# Altium PCB ESC ITERATION 2.PcbDoc (part 1 of 2)
Units mm, origin at the board's own origin, x right, y up, seen from the top; angles counter-clockwise.
Board outline 46 x 52 mm, 4 copper layers (Top Layer, Layer 1, Layer 2, Bottom Layer), stack 0.603 mm thick; 168 components, 143 nets, 732 pads, 629 vias.
Unrouted connection lines stored in the file: 310.
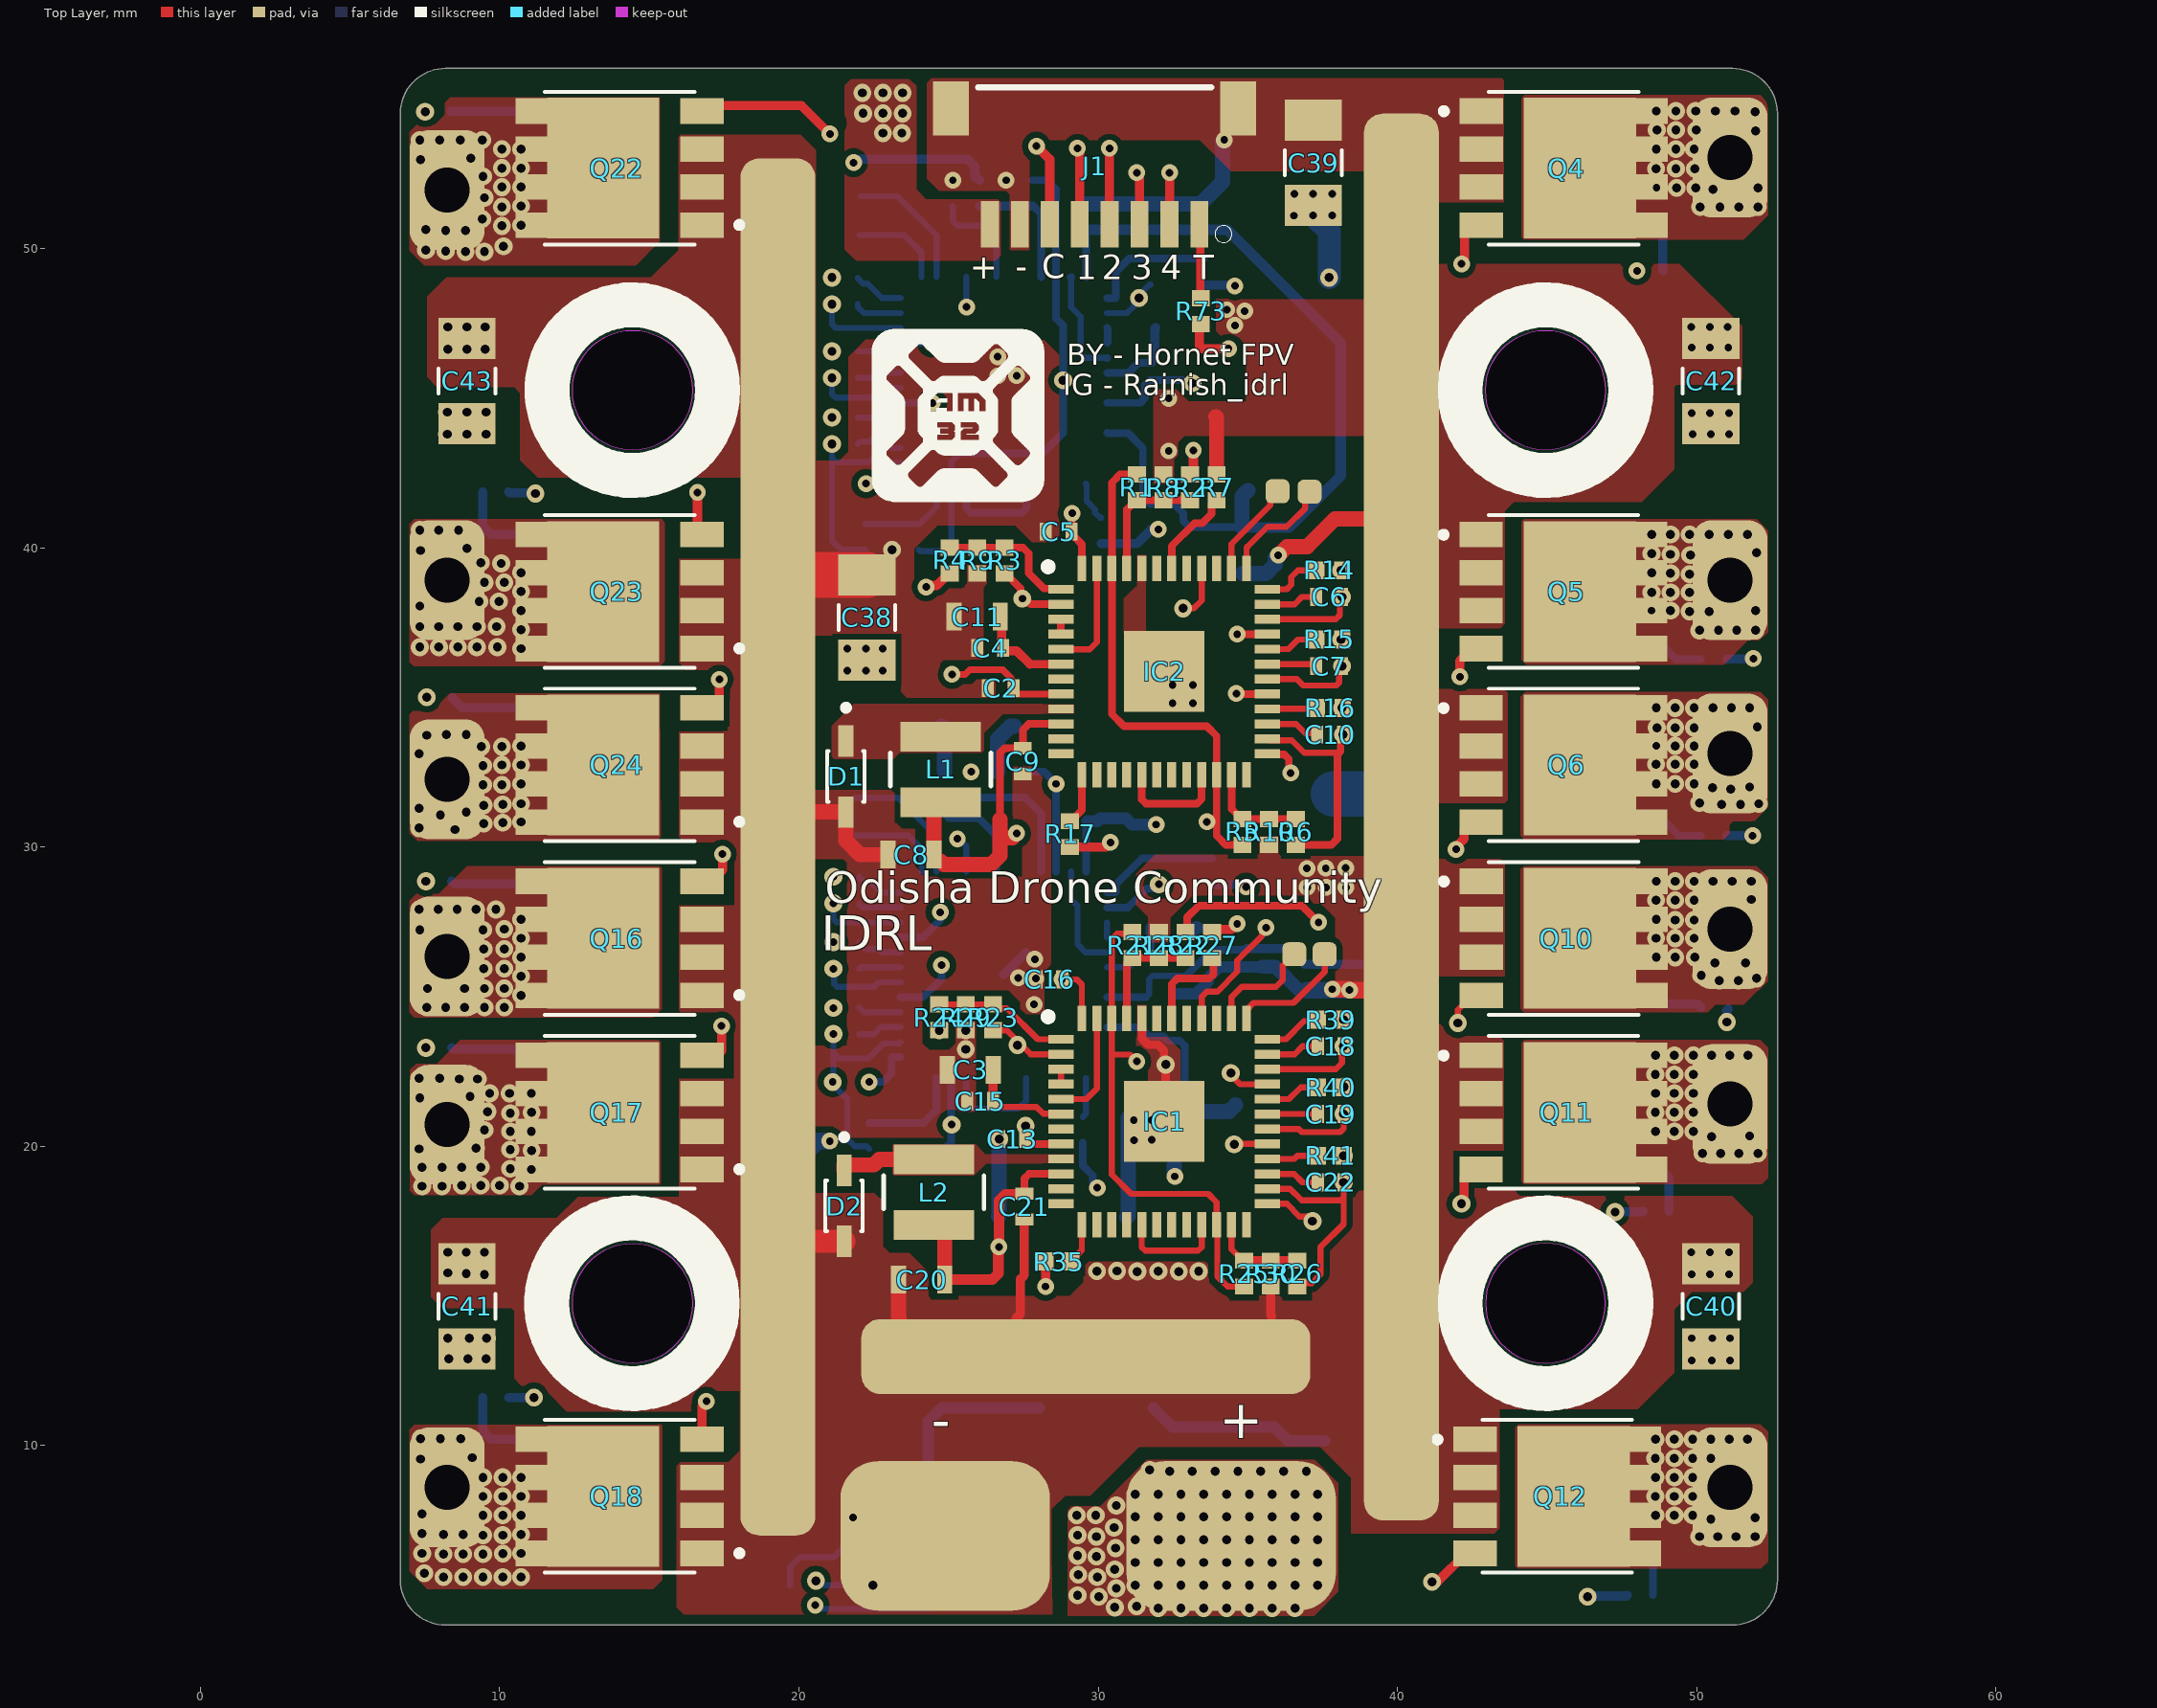
[diagram p0: Top Layer view]
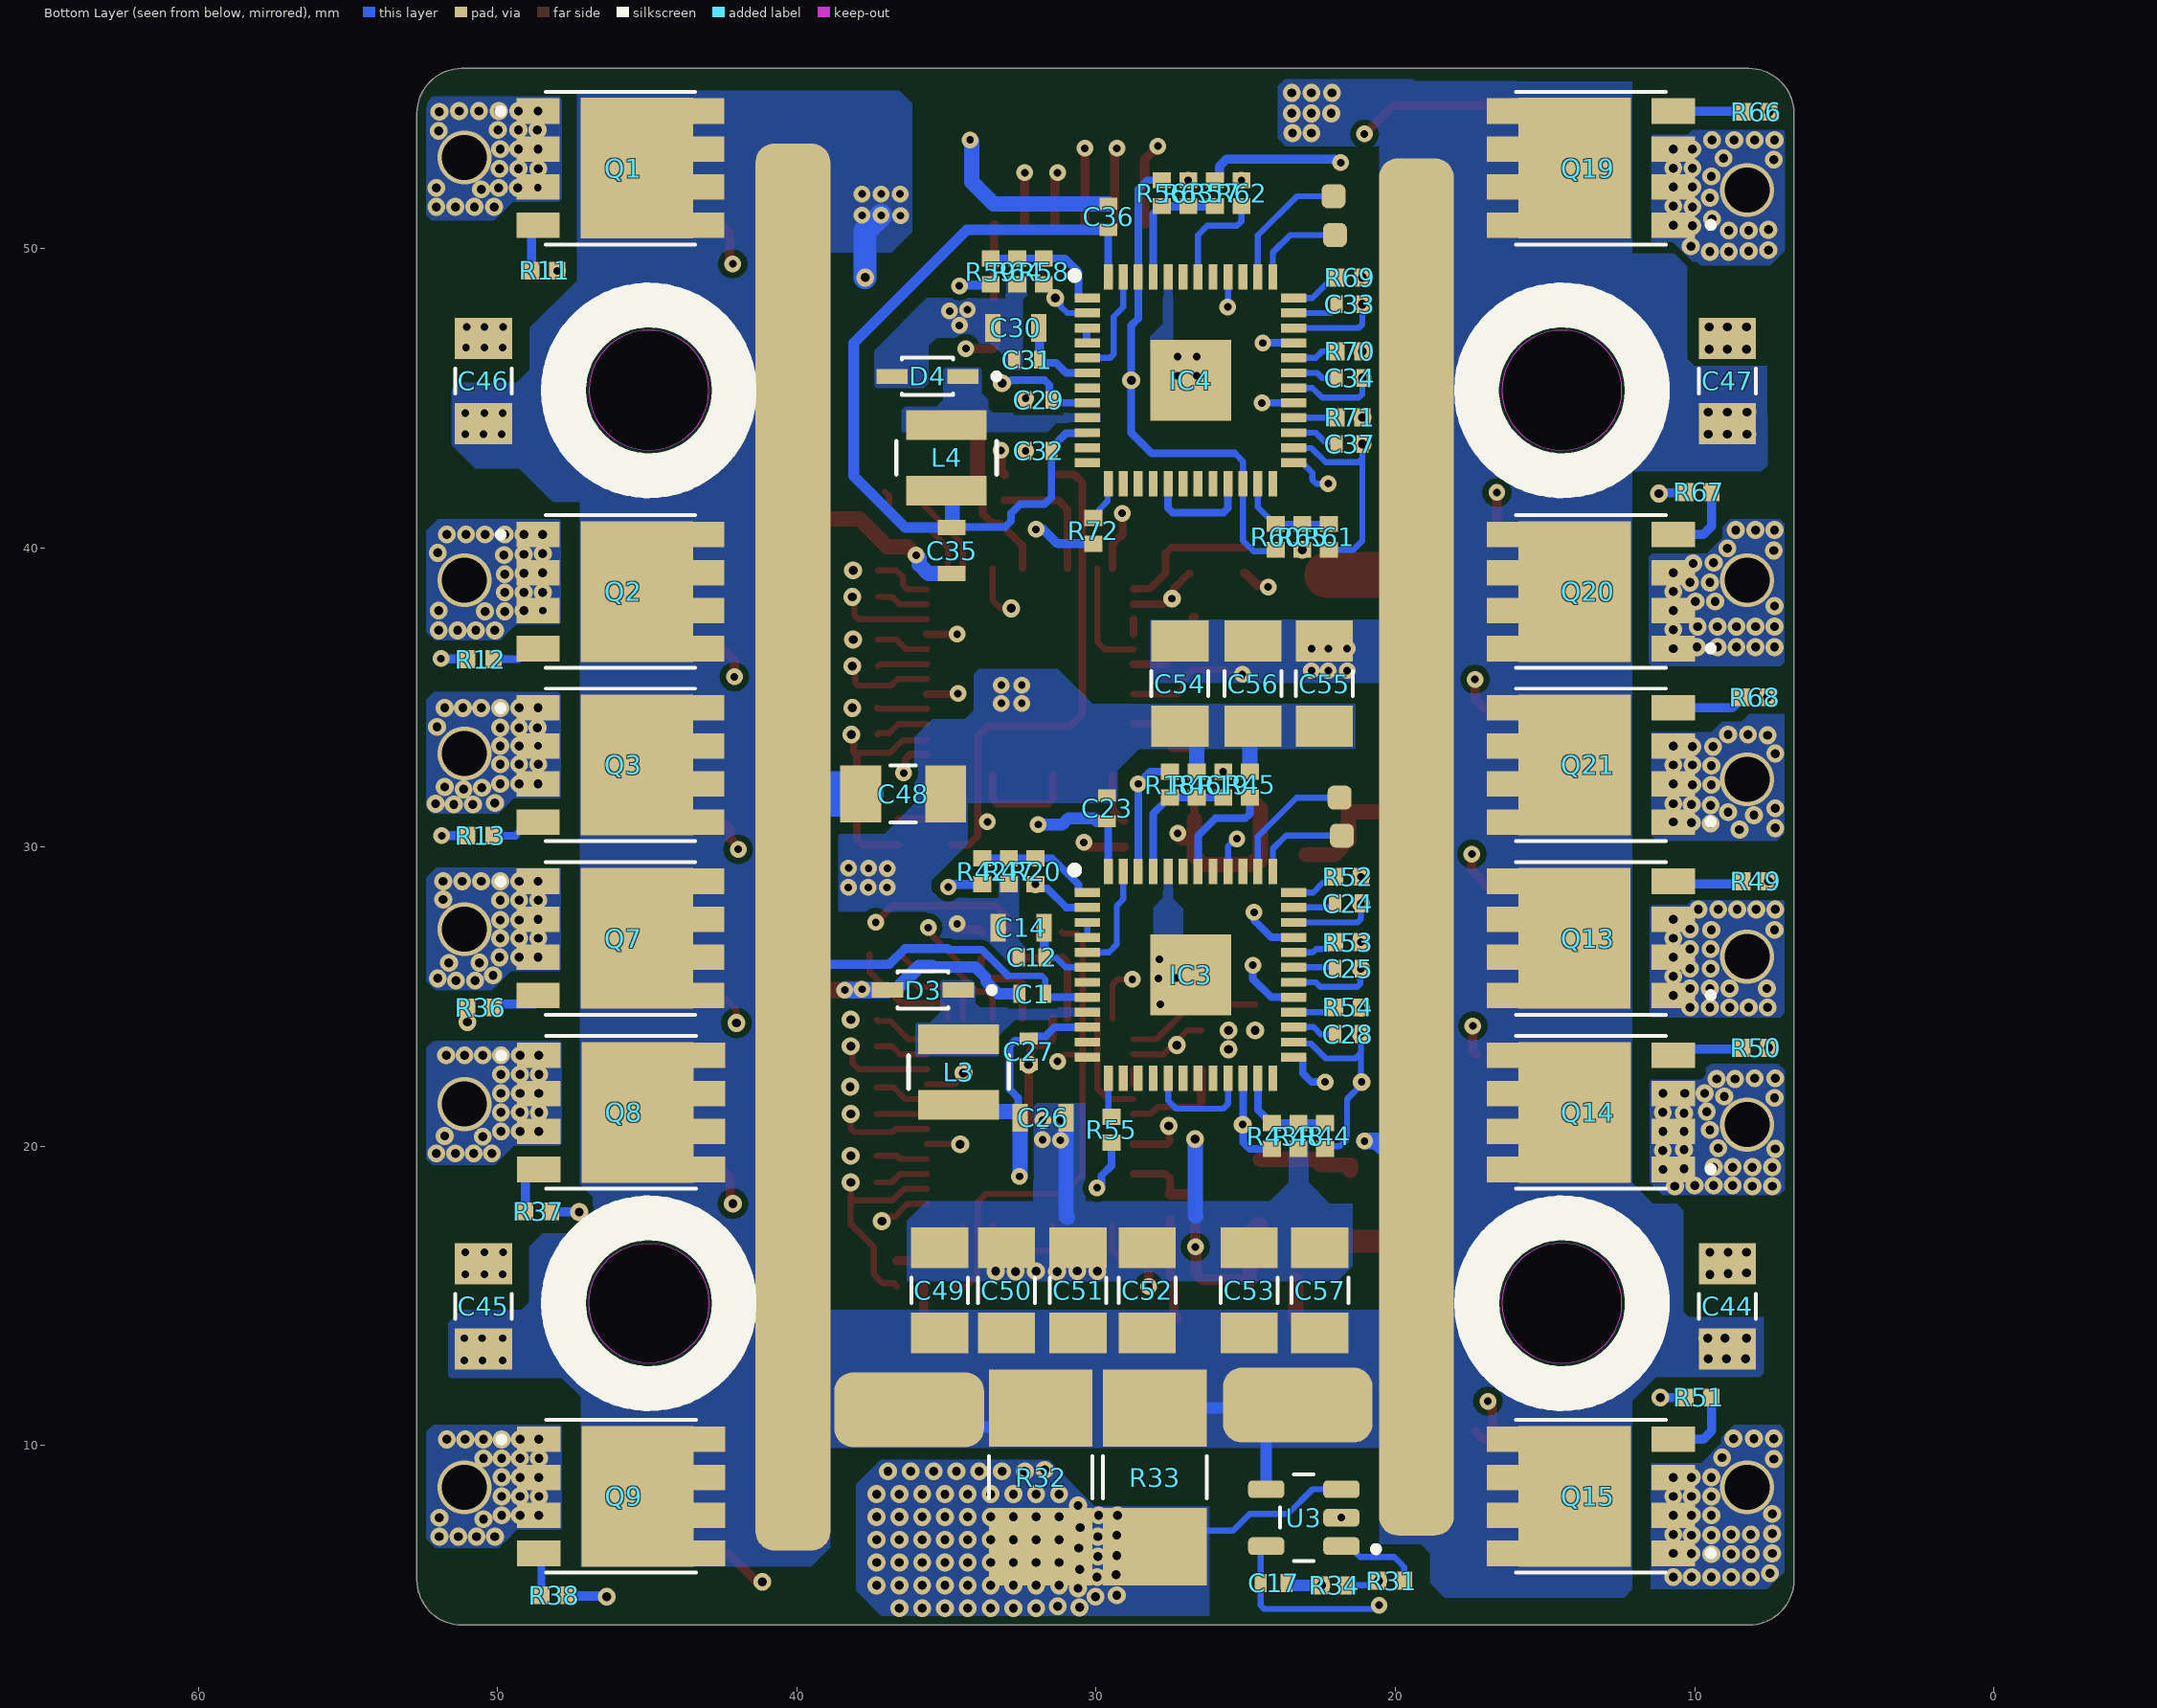
[diagram p1: Bottom Layer view, seen from below]
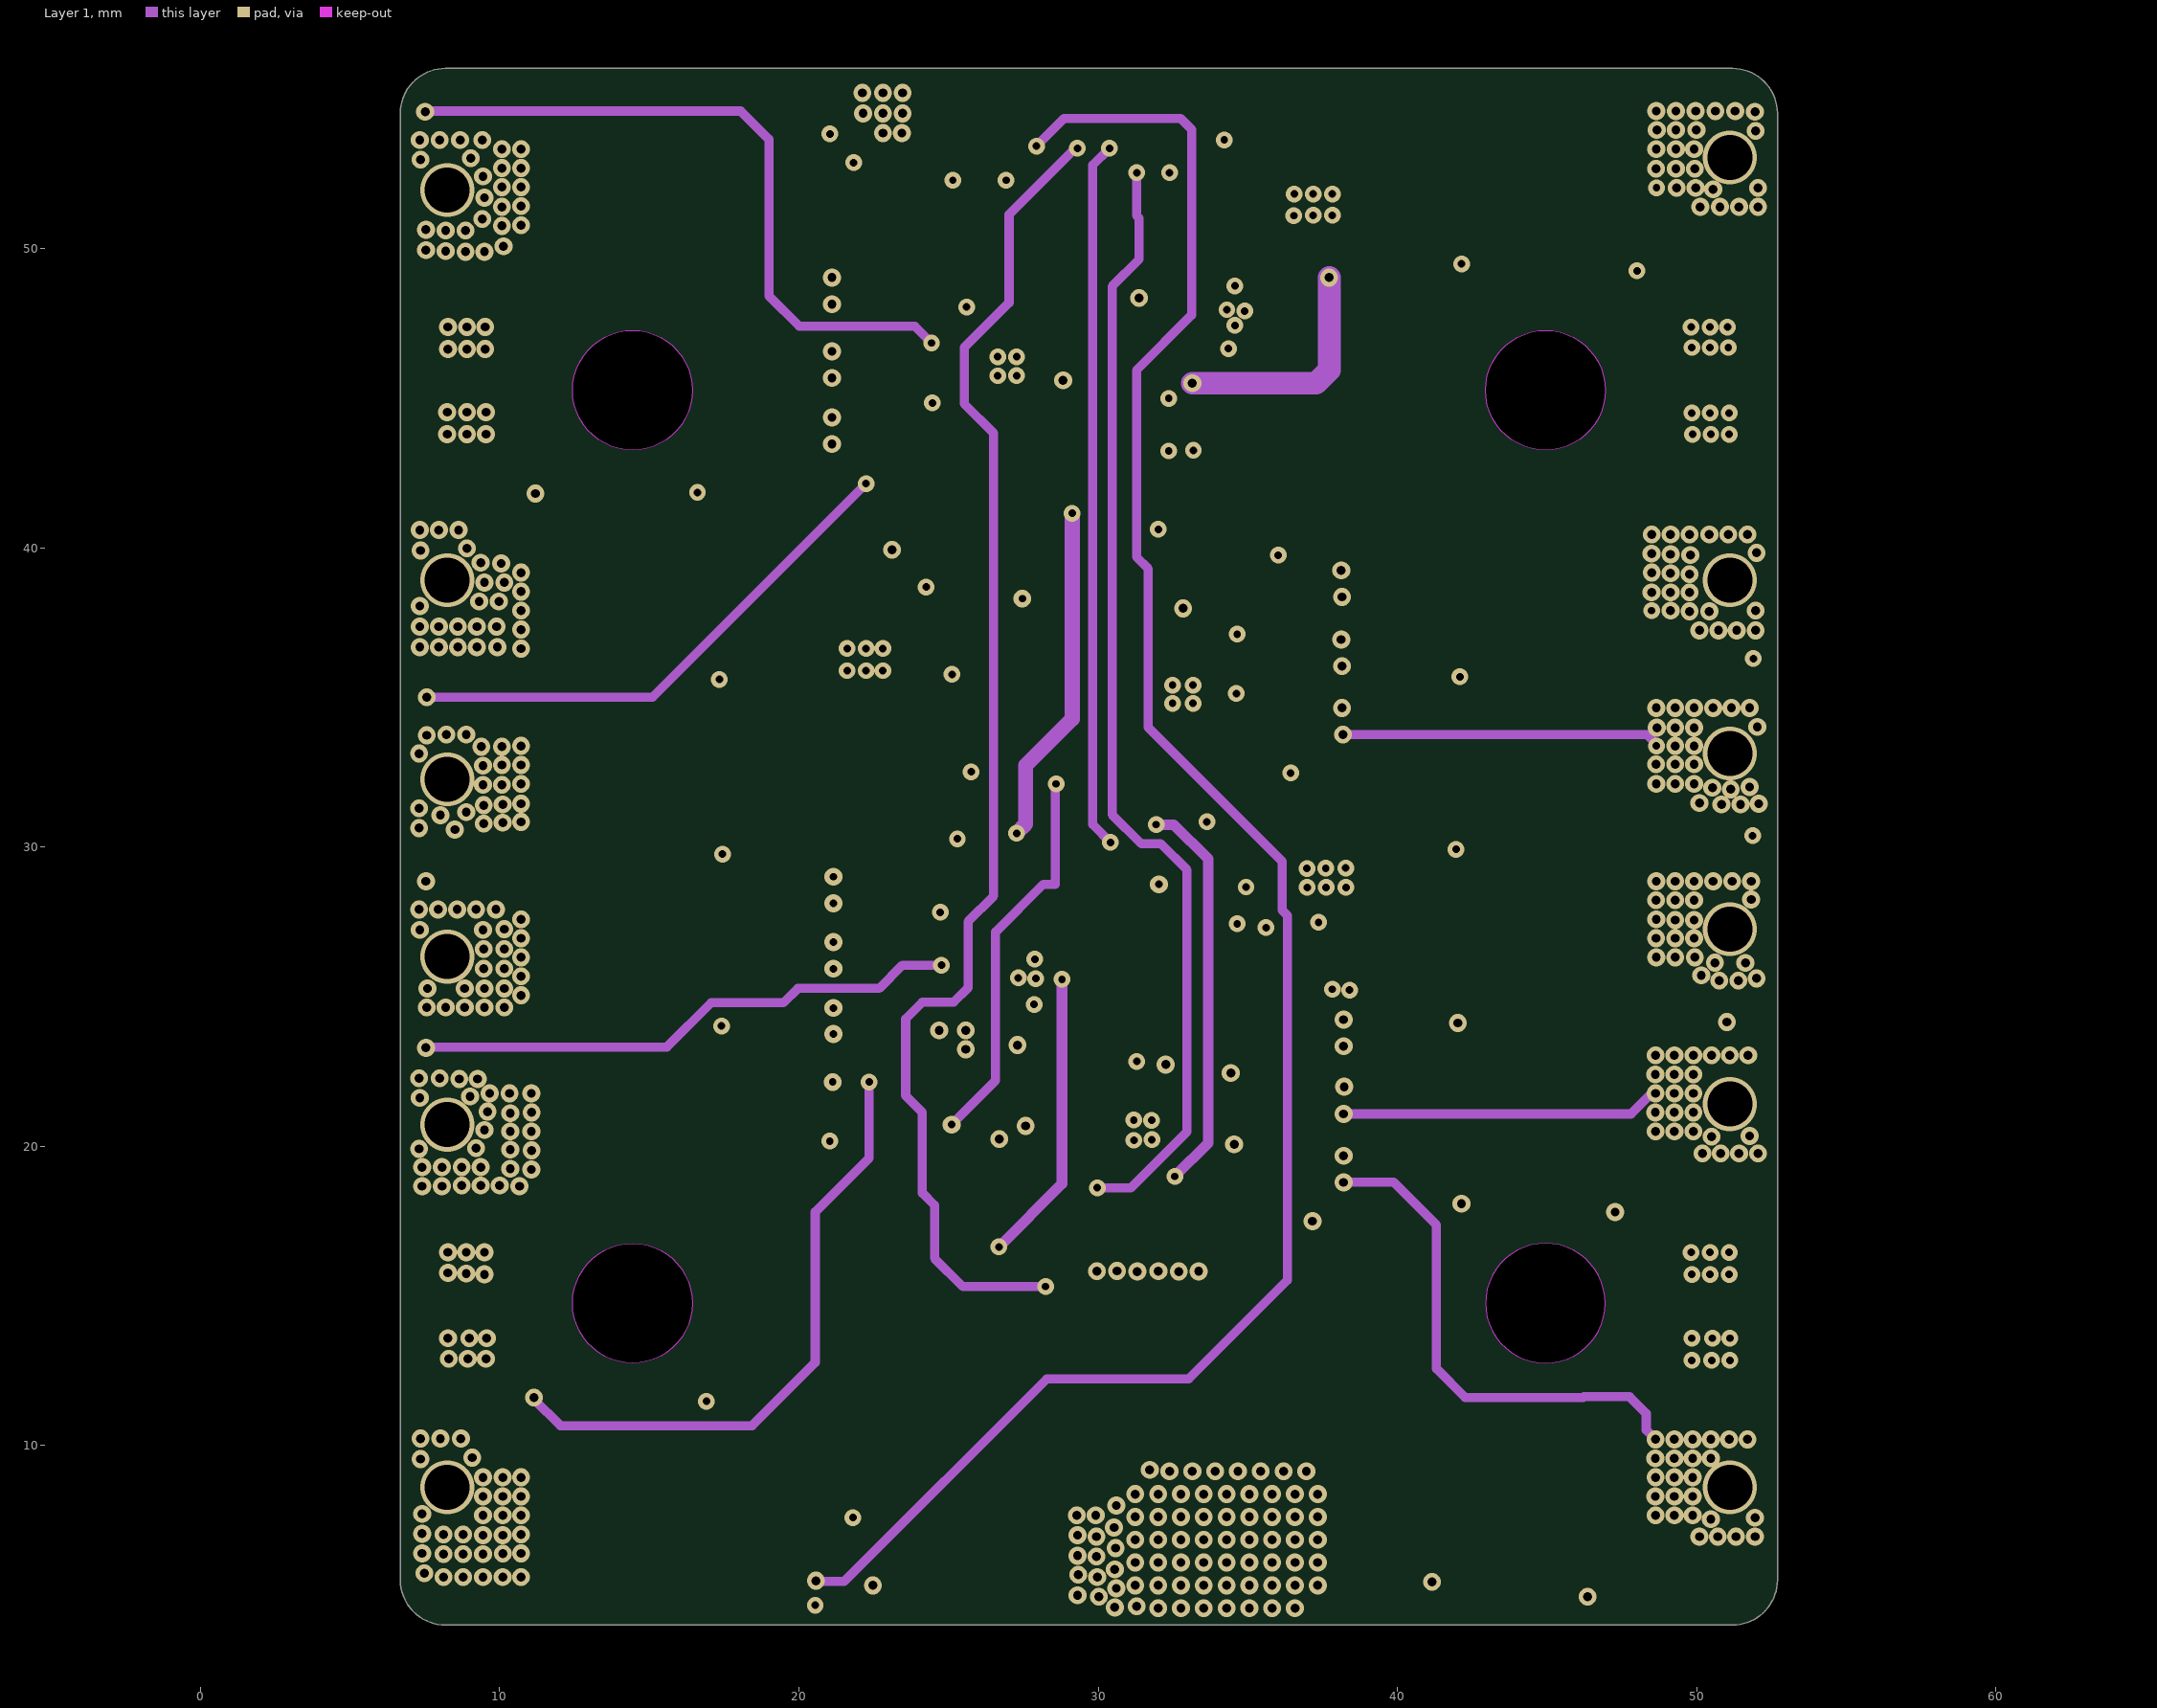
[diagram p2: Layer 1]
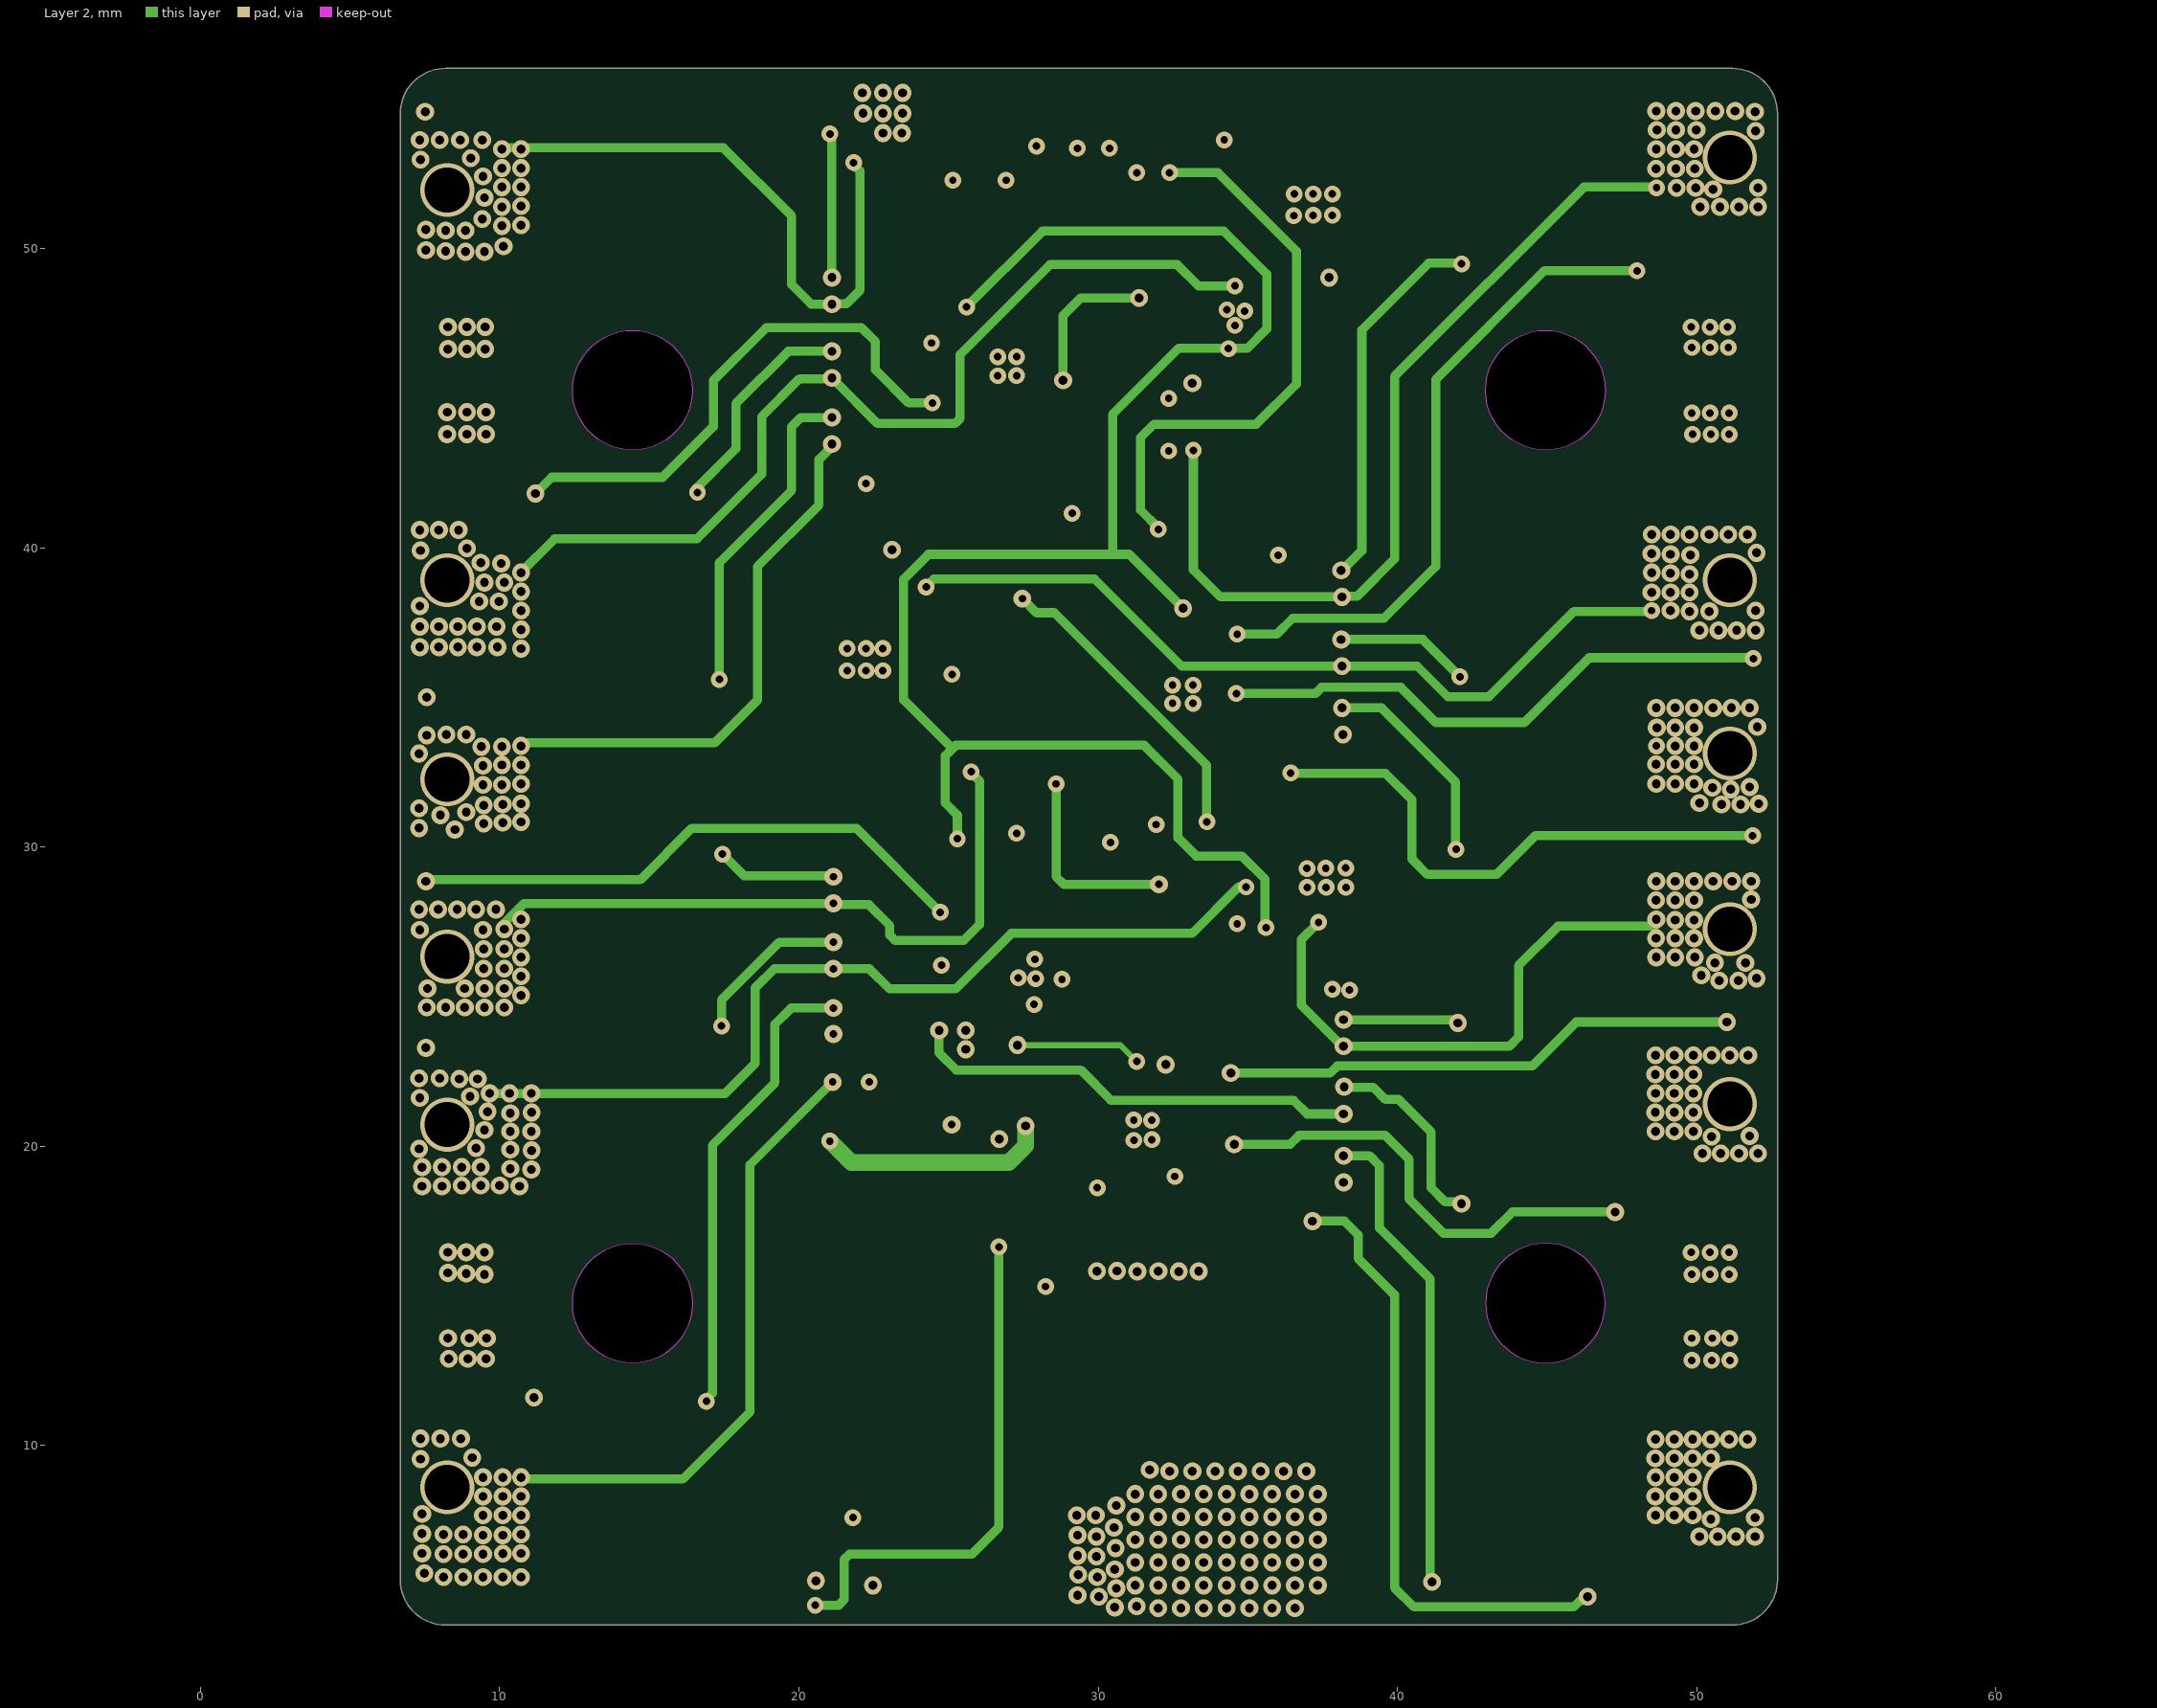
[diagram p3: Layer 2]
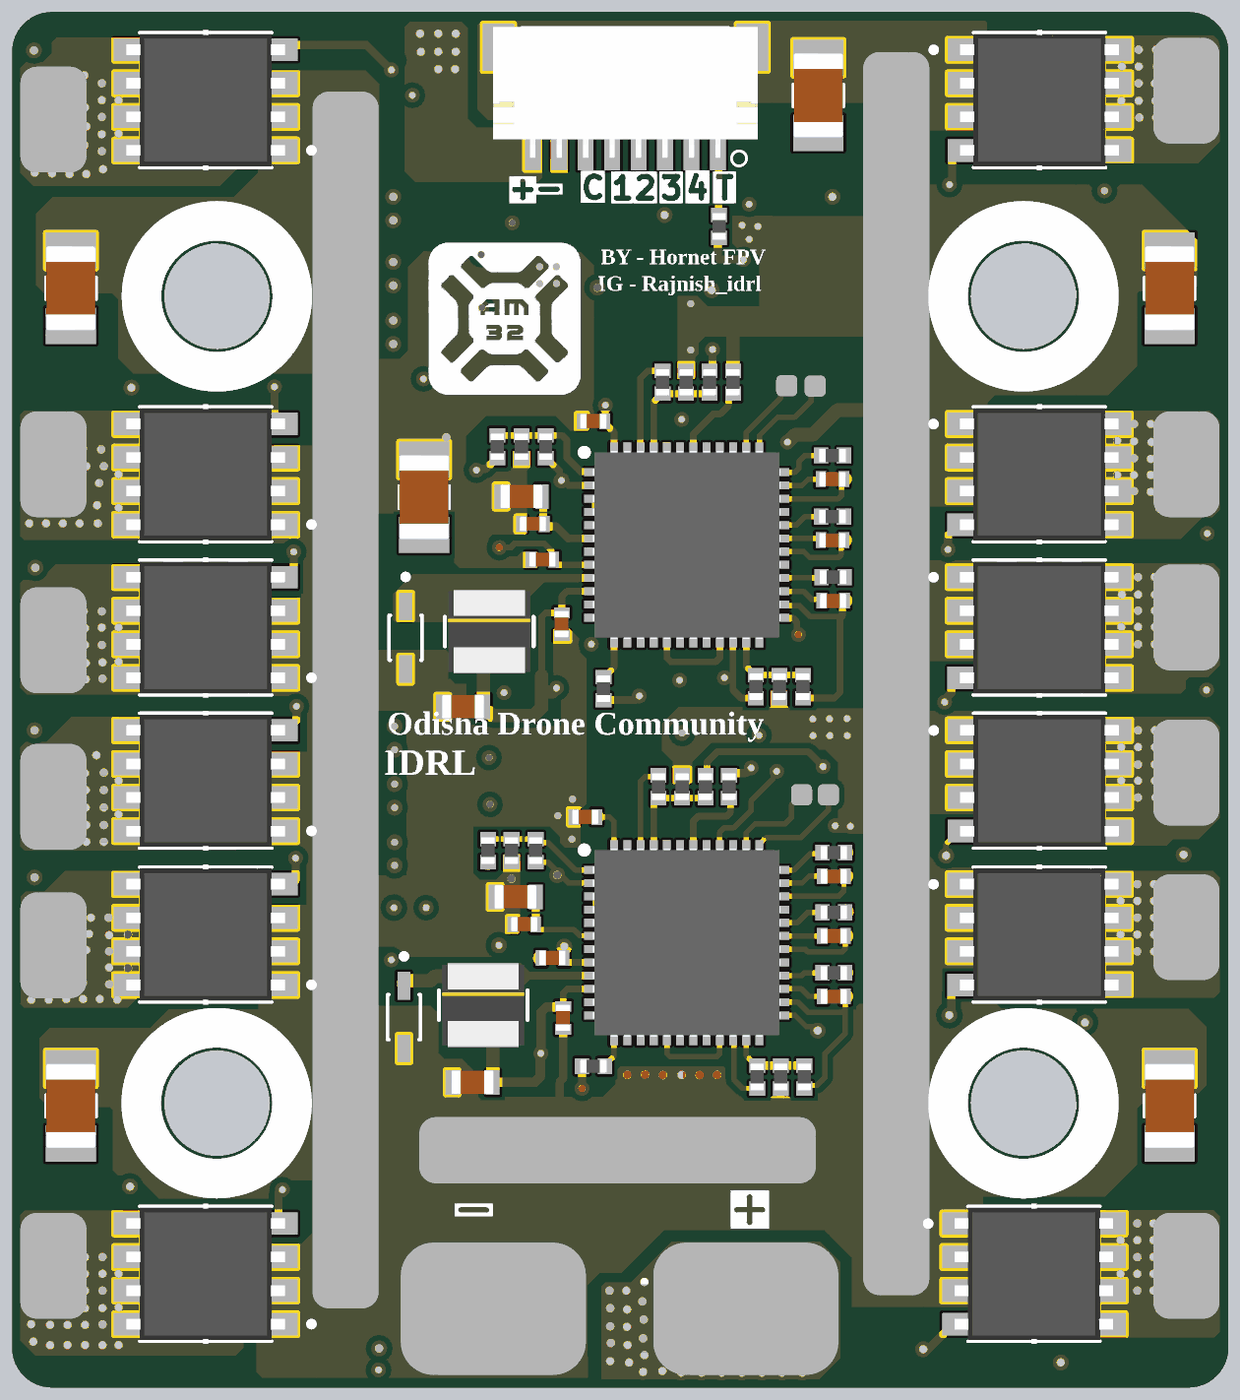
[diagram p5: 3D render of the assembled board from above, using the file's embedded part models]
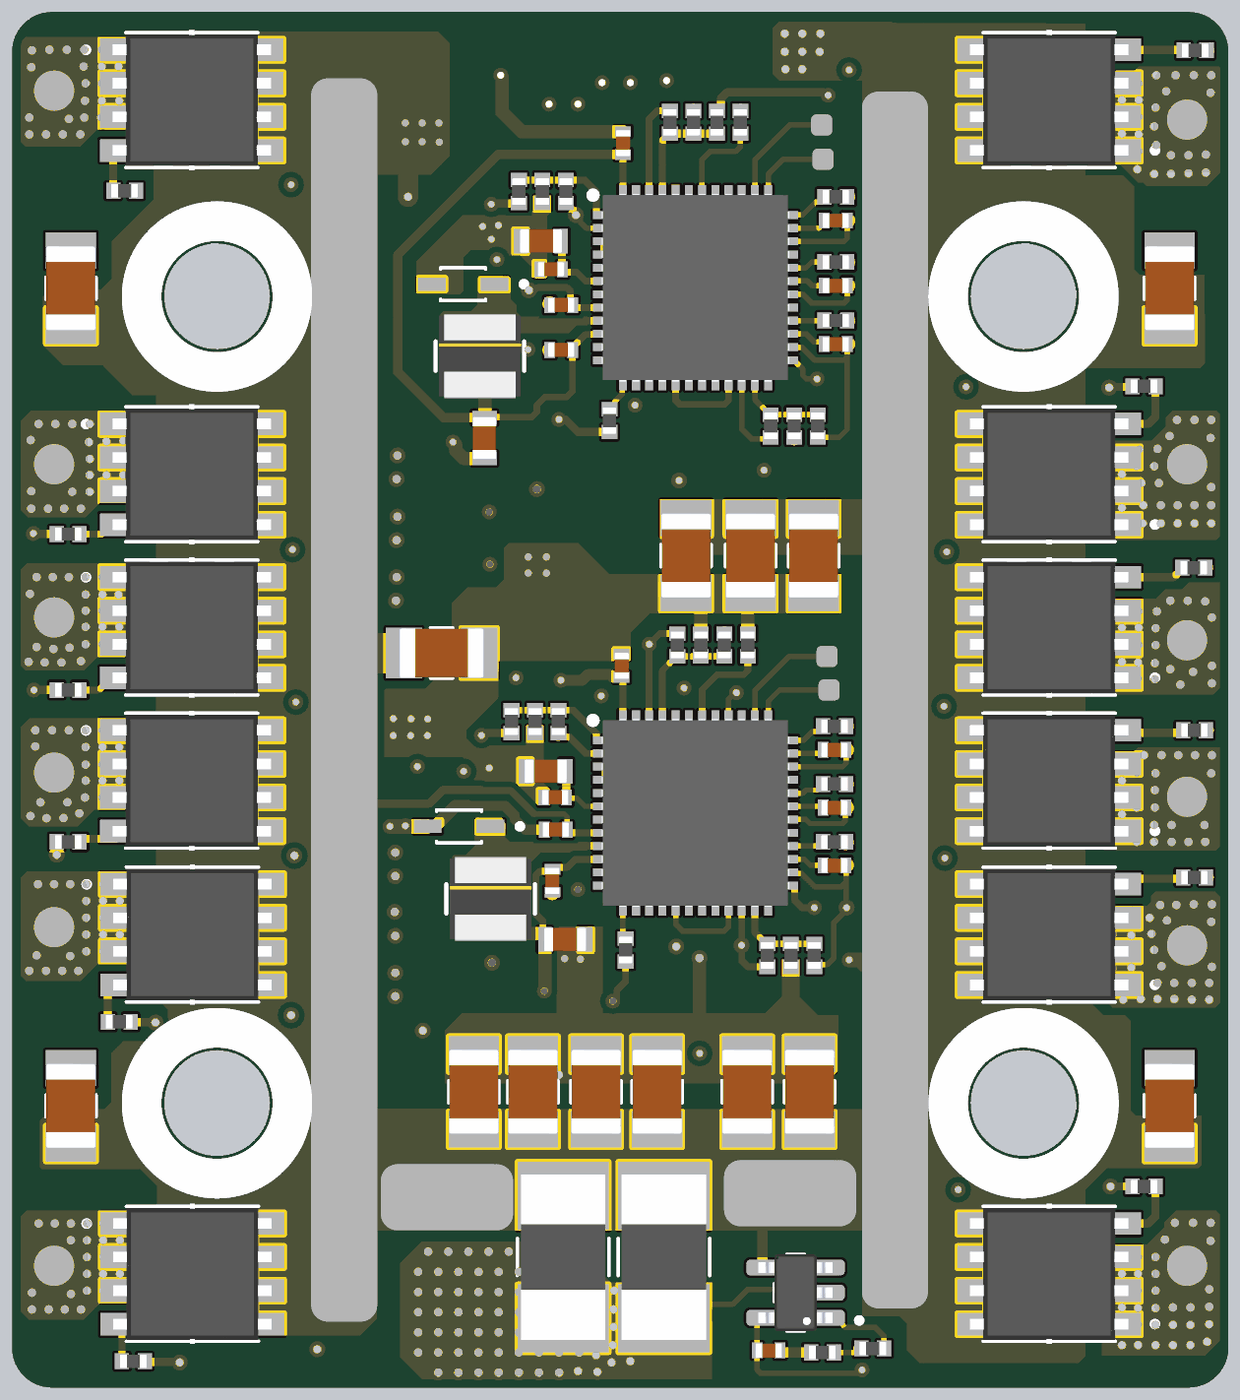
[diagram p6: 3D render of the assembled board from below, using the file's embedded part models]

## Layer stack, top to bottom
Top Solder: solder mask 0.0102, Solder Resist, Dk 3.5
Top Layer: signal copper 0.0356
Dielectric 2: prepreg 0.0711, PP-006, Dk 4.1
Layer 1: signal copper 0.035
Dielectric 1: dielectric 0.32, FR-4, Dk 4.8
Layer 2: signal copper 0.035
Dielectric 3: prepreg 0.0711, PP-006, Dk 4.1
Bottom Layer: signal copper 0.0356
Bottom Solder: solder mask 0.0102, Solder Resist, Dk 3.5

## Board outline
6.692,5.509 ccw(c8.192,5.509) 8.192,4.009 51.192,4.009 ccw(c51.192,5.509) 52.692,5.509 52.692,54.509 ccw(c51.192,54.509) 51.192,56.009 8.192,56.009 ccw(c8.192,54.509) 6.692,54.509
cut-out: 14.442,12.759 cw(c14.442,14.759) 12.442,14.759 cw(c14.442,14.759) 14.442,16.759 cw(c14.442,14.759) 16.442,14.759 cw(c14.442,14.759)
cut-out: 14.442,43.259 cw(c14.442,45.259) 12.442,45.259 cw(c14.442,45.259) 14.442,47.259 cw(c14.442,45.259) 16.442,45.259 cw(c14.442,45.259)
cut-out: 42.942,14.759 ccw(c44.942,14.759) 44.942,12.759 ccw(c44.942,14.759) 46.942,14.759 ccw(c44.942,14.759) 44.942,16.759 ccw(c44.942,14.759)
cut-out: 44.942,43.259 cw(c44.942,45.259) 42.942,45.259 cw(c44.942,45.259) 44.942,47.259 cw(c44.942,45.259) 46.942,45.259 cw(c44.942,45.259)

## Design rules (kind name [scope] priority, off if disabled: settings)
BoardOutlineClearance [All] p1: gap=0.305 ignorepadtopadclearanceinfootprint=FALSE
Clearance [All] p1: gap=0.203 ignorepadtopadclearanceinfootprint=TRUE
MinimumAnnularRing [All] p1: minimumring=0.152
PlaneClearance [All] p1: clearance=0.203
PlaneConnect [All] p1: planeconnectstyle=Direct reliefexpansion=0.508 reliefentries=4 reliefconductorwidth=0.254 reliefairgap=0.254
PolygonConnect [All] p1: connectstyle=Direct reliefconductorwidth=0.254 reliefentries=4 polygonreliefangle="90 Angle" airgapwidth=0.254
RoutingVias [All] p1: holewidth=0.3 width=0.6 viastyle="Through Hole" minholewidth=0.254 minwidth=0.559 maxholewidth=10.16 maxwidth=15.24
SolderMaskExpansion [All] p1: expansion=0.102 istentingtop=FALSE
Width [All] p1: maxlimit=10.16 minlimit=0.203 preferedwidth=0.254
28 further rules are at their usual default settings.

## Classes and differential pairs
component class "STSPIN32F0A ESC5": C29 C30 C31 C32 C33 C34 C35 C36 C37 D4 IC4 L4 Q19 Q20 Q21 Q22 Q23 Q24 R56 R57 R58 R59 R60 R61 R62 R63 R64 R65 R66 R67 R68 R69 R70 R71 R72
component class "STSPIN32F0A ESC4": C1 C12 C14 C23 C24 C25 C26 C27 C28 C38 C39 C40 C41 C42 C43 C44 C45 C46 C47 C48 C49 C50 C51 C52 C53 C54 C55 C56 C57 D3 IC3 L3 Q13 Q14 Q15 Q16 Q17 Q18 R18 R19 R20 R42 R43 R44 R45 R46 R47 R48 R49 R50 R51 R52 R53 R54 R55
component class "STSPIN32F0A ESC3": C2 C4 C5 C6 C7 C8 C9 C10 C11 D1 IC2 J1 L1 Q1 Q2 Q3 Q4 Q5 Q6 R1 R2 R3 R4 R5 R6 R7 R8 R9 R10 R11 R12 R13 R14 R15 R16 R17 R73
component class "STSPIN32F0A ESC2": C3 C13 C15 C16 C17 C18 C19 C20 C21 C22 D2 IC1 L2 Q7 Q8 Q9 Q10 Q11 Q12 R21 R22 R23 R24 R25 R26 R27 R28 R29 R30 R31 R32 R33 R34 R35 R36 R37 R38 R39 R40 R41 U3

## Components (designator, comment, footprint, x,y, rotation, side; value= is the part's Value field where it differs from the comment)
C1 "0.1uF" CAPC1005X55N 32.131,25.095 r180 bottom
C2 "0.1uF" CAPC1005X55N 26.746,35.306 r0 top
C3 "10uF" CAPC1608X90N 25.73,22.555 r0 top
C4 "0.1uF" CAPC1005X55N 26.391,36.652 r0 top
C5 "0.1uF" CAPC1005X55N 28.677,40.538 r0 top
C6 "680nF" CAPC1005X55N 37.719,38.354 r180 top
C7 "680nF" CAPC1005X55N 37.719,36.043 r180 top
C8 "47uF" CAPC1608X90N 23.749,29.743 r0 top
C9 "0.1uF" CAPC1005X55N 27.483,32.868 r90 top
C10 "680nF" CAPC1005X55N 37.744,33.757 r180 top
C11 "10uF" CAPC1608X90N 25.959,37.694 r0 top
C12 "0.1uF" CAPC1005X55N 32.156,26.314 r180 bottom
C13 "0.1uF" CAPC1005X55N 27.127,20.244 r0 top
C14 "10uF" CAPC1608X90N 32.512,27.305 r180 bottom
C15 "0.1uF" CAPC1005X55N 26.06,21.514 r0 top
C16 "0.1uF" CAPC1005X55N 28.372,25.578 r0 top
C17 "0.1uF" CAPC1005X55N 24.079,5.41 r0 bottom
C18 "680nF" CAPC1005X55N 37.77,23.343 r180 top
C19 "680nF" CAPC1005X55N 37.77,21.082 r180 top
C20 "47uF" CAPC1608X90N 24.105,15.545 r0 top
C21 "0.1uF" CAPC1005X55N 27.534,17.983 r90 top
C22 "680nF" CAPC1005X55N 37.77,18.796 r180 top
C23 "0.1uF" CAPC1005X55N 29.642,31.293 r270 bottom
C24 "680nF" CAPC1005X55N 21.59,28.118 r0 bottom
C25 "680nF" CAPC1005X55N 21.59,25.933 r0 bottom
C26 "47uF" CAPC1608X90N 31.775,20.955 r0 bottom
C27 "0.1uF" CAPC1005X55N 32.258,23.165 r90 bottom
C28 "680nF" CAPC1005X55N 21.59,23.749 r0 bottom
C29 "0.1uF" CAPC1005X55N 31.928,44.933 r180 bottom
C30 "10uF" CAPC1608X90N 32.69,47.346 r180 bottom
C31 "0.1uF" CAPC1005X55N 32.309,46.279 r180 bottom
C32 "0.1uF" CAPC1005X55N 31.928,43.231 r180 bottom
C33 "680nF" CAPC1005X55N 21.539,48.133 r0 bottom
C34 "680nF" CAPC1005X55N 21.539,45.669 r0 bottom
C35 "47uF" CAPC1608X90N 34.823,39.903 r90 bottom
C36 "0.1uF" CAPC1005X55N 29.591,51.054 r270 bottom
C37 "680nF" CAPC1005X55N 21.539,43.459 r0 bottom
C38 "10uF" CAPC3216X190N 22.276,37.668 r270 top
C39 "10uF" CAPC3216X190N 37.186,52.857 r270 top
C40 "10uF" CAPC3216X190N 50.47,14.656 r270 top
C41 "10uF" CAPC3216X190N 8.915,14.656 r270 top
C42 "10uF" CAPC3216X190N 50.47,45.568 r270 top
C43 "10uF" CAPC3216X190N 8.915,45.568 r270 top
C44 "10uF" CAPC3216X190N 8.915,14.656 r270 bottom
C45 "10uF" CAPC3216X190N 50.47,14.656 r270 bottom
C46 "10uF" CAPC3216X190N 50.47,45.568 r270 bottom
C47 "10uF" CAPC3216X190N 8.915,45.568 r270 bottom
C48 "10uF" CAPC3216X190N 36.449,31.775 r0 bottom
C49 "10uF" CAPC3216X190N 35.23,15.189 r270 bottom
C50 "10uF" CAPC3216X190N 32.995,15.189 r270 bottom
C51 "10uF" CAPC3216X190N 30.607,15.189 r270 bottom
C52 "10uF" CAPC3216X190N 28.296,15.189 r270 bottom
C53 "10uF" CAPC3216X190N 24.892,15.189 r270 bottom
C54 "10uF" CAPC3216X190N 27.203,35.458 r90 bottom
C55 "10uF" CAPC3216X190N 22.377,35.458 r90 bottom
C56 "10uF" CAPC3216X190N 24.765,35.458 r90 bottom
C57 "10uF" CAPC3216X190N 22.53,15.189 r270 bottom
D1 "B5819WS-TP" SOD2512X115N 21.574,32.352 r270 top
D2 "B5819WS-TP" SOD2512X115N 21.514,18.009 r270 top
D3 "B5819WS-TP" SOD2512X115N 35.789,25.222 r0 bottom
D4 "B5819WS-TP" SOD2512X115N 35.636,45.72 r0 bottom
IC1 "STSPIN32F0ATR" QFN50P700X700X100-49N-D 32.207,20.828 r0 top
IC2 "STSPIN32F0ATR" QFN50P700X700X100-49N-D 32.207,35.86 r0 top
IC3 "STSPIN32F0ATR" QFN50P700X700X100-49N-D 26.848,25.73 r180 bottom
IC4 "STSPIN32F0ATR" QFN50P700X700X100-49N-D 26.848,45.589 r180 bottom
J1 "SM08B-SRSS-TB(LF)(SN)" JST_SM08B-SRSS-TB(LF)(SN) 29.885,55.575 r180 top
L1 "22uH" IND_BOURNS_SRN3015 24.74,32.588 r270 top
L2 "22uH" IND_BOURNS_SRN3015 24.511,18.466 r270 top
L3 "22uH" IND_BOURNS_SRN3015 34.595,22.479 r270 bottom
L4 "22uH" IND_BOURNS_SRN3015 35.001,43.002 r270 bottom
Q1 "TPHR8504PL,L1Q" TRANS_TPHR8504PL,L1Q 45.898,52.68 r180 bottom
Q2 "TPHR8504PL,L1Q" TRANS_TPHR8504PL,L1Q 45.898,38.532 r180 bottom
Q3 "TPHR8504PL,L1Q" TRANS_TPHR8504PL,L1Q 45.898,32.741 r180 bottom
Q4 "TPHR8504PL,L1Q" TRANS_TPHR8504PL,L1Q 45.549,52.68 r0 top
Q5 "TPHR8504PL,L1Q" TRANS_TPHR8504PL,L1Q 45.542,38.532 r0 top
Q6 "TPHR8504PL,L1Q" TRANS_TPHR8504PL,L1Q 45.542,32.741 r0 top
Q7 "TPHR8504PL,L1Q" TRANS_TPHR8504PL,L1Q 45.898,26.949 r180 bottom
Q8 "TPHR8504PL,L1Q" TRANS_TPHR8504PL,L1Q 45.872,21.133 r180 bottom
Q9 "TPHR8504PL,L1Q" TRANS_TPHR8504PL,L1Q 45.872,8.306 r180 bottom
Q10 "TPHR8504PL,L1Q" TRANS_TPHR8504PL,L1Q 45.549,26.949 r0 top
Q11 "TPHR8504PL,L1Q" TRANS_TPHR8504PL,L1Q 45.542,21.133 r0 top
Q12 "TPHR8504PL,L1Q" TRANS_TPHR8504PL,L1Q 45.339,8.306 r0 top
Q13 "TPHR8504PL,L1Q" TRANS_TPHR8504PL,L1Q 13.471,26.949 r0 bottom
Q14 "TPHR8504PL,L1Q" TRANS_TPHR8504PL,L1Q 13.469,21.133 r0 bottom
Q15 "TPHR8504PL,L1Q" TRANS_TPHR8504PL,L1Q 13.469,8.306 r0 bottom
Q16 "TPHR8504PL,L1Q" TRANS_TPHR8504PL,L1Q 14.014,26.949 r180 top
Q17 "TPHR8504PL,L1Q" TRANS_TPHR8504PL,L1Q 14.014,21.133 r180 top
Q18 "TPHR8504PL,L1Q" TRANS_TPHR8504PL,L1Q 14.014,8.306 r180 top
Q19 "TPHR8504PL,L1Q" TRANS_TPHR8504PL,L1Q 13.469,52.68 r0 bottom
Q20 "TPHR8504PL,L1Q" TRANS_TPHR8504PL,L1Q 13.469,38.532 r0 bottom
Q21 "TPHR8504PL,L1Q" TRANS_TPHR8504PL,L1Q 13.469,32.741 r0 bottom
Q22 "TPHR8504PL,L1Q" TRANS_TPHR8504PL,L1Q 14.014,52.68 r180 top
Q23 "TPHR8504PL,L1Q" TRANS_TPHR8504PL,L1Q 14.014,38.532 r180 top
Q24 "TPHR8504PL,L1Q" TRANS_TPHR8504PL,L1Q 14.014,32.741 r180 top
R1 "10K" RESC1005X37N 31.293,42.012 r90 top
R2 "10K" RESC1005X37N 33.071,42.011 r270 top
R3 "10K" RESC1005X37N 26.873,39.573 r270 top
R4 "10K" RESC1005X37N 25.044,39.573 r90 top
R5 "10K" RESC1005X37N 34.823,30.506 r270 top
R6 "10K" RESC1005X37N 36.601,30.505 r90 top
R7 "10K" RESC1005X37N 33.96,42.012 r270 top
R8 "1K" RESC1005X37N 32.182,42.012 r90 top
R9 "1K" RESC1005X37N 25.959,39.573 r270 top
R10 "1K" RESC1005X37N 35.712,30.505 r270 top
R11 "22R" RESC1005X37N 48.438,49.251 r180 bottom
R12 "22R" RESC1005X37N 50.571,36.271 r0 bottom
R13 "22R" RESC1005X37N 50.571,30.378 r0 bottom
R14 "22R" RESC1005X37N 37.719,39.243 r180 top
R15 "22R" RESC1005X37N 37.719,36.932 r180 top
R16 "22R" RESC1005X37N 37.744,34.646 r180 top
R17 "1K" RESC1005X37N 29.058,30.429 r90 top
R18 "10K" RESC1005X37N 27.534,32.08 r90 bottom
R19 "10K" RESC1005X37N 25.756,32.08 r270 bottom
R20 "10K" RESC1005X37N 32.029,29.185 r270 bottom
R21 "10K" RESC1005X37N 31.14,26.721 r90 top
R22 "10K" RESC1005X37N 32.918,26.721 r270 top
R23 "10K" RESC1005X37N 26.492,24.308 r270 top
R24 "10K" RESC1005X37N 24.689,24.308 r90 top
R25 "10K" RESC1005X37N 34.874,15.748 r270 top
R26 "10K" RESC1005X37N 36.652,15.748 r90 top
R27 "10K" RESC1005X37N 33.807,26.721 r270 top
R28 "1K" RESC1005X37N 32.029,26.721 r90 top
R29 "1K" RESC1005X37N 25.578,24.308 r270 top
R30 "1K" RESC1005X37N 35.763,15.748 r270 top
R31 "1K" RESC1005X37N 20.142,5.486 r0 bottom
R32 "CSSH2512JTL500" RESC6232X104N 31.852,8.941 r90 bottom
R33 "CSSH2512JTL500" RESC6232X104N 28.042,8.941 r90 bottom
R34 "1K" RESC1005X37N 22.047,5.334 r0 bottom
R35 "1K" RESC1005X37N 28.677,16.154 r0 top
R36 "22R" RESC1005X37N 50.571,24.638 r0 bottom
R37 "22R" RESC1005X37N 48.641,17.831 r180 bottom
R38 "22R" RESC1005X37N 48.108,5.004 r180 bottom
R39 "22R" RESC1005X37N 37.77,24.232 r180 top
R40 "22R" RESC1005X37N 37.77,21.971 r180 top
R41 "22R" RESC1005X37N 37.77,19.685 r180 top
R42 "10K" RESC1005X37N 33.807,29.185 r90 bottom
R43 "10K" RESC1005X37N 24.13,20.345 r270 bottom
R44 "10K" RESC1005X37N 22.352,20.345 r90 bottom
R45 "10K" RESC1005X37N 24.867,32.08 r270 bottom
R46 "1K" RESC1005X37N 26.645,32.08 r90 bottom
R47 "1K" RESC1005X37N 32.918,29.185 r270 bottom
R48 "1K" RESC1005X37N 23.241,20.345 r270 bottom
R49 "22R" RESC1005X37N 7.976,28.854 r180 bottom
R50 "22R" RESC1005X37N 7.976,23.292 r180 bottom
R51 "22R" RESC1005X37N 9.881,11.608 r0 bottom
R52 "22R" RESC1005X37N 21.59,29.007 r0 bottom
R53 "22R" RESC1005X37N 21.59,26.822 r0 bottom
R54 "22R" RESC1005X37N 21.59,24.638 r0 bottom
R55 "1K" RESC1005X37N 29.489,20.549 r90 bottom
R56 "10K" RESC1005X37N 27.813,51.841 r90 bottom
R57 "10K" RESC1005X37N 26.035,51.841 r270 bottom
R58 "10K" RESC1005X37N 31.75,49.225 r270 bottom
R59 "10K" RESC1005X37N 33.528,49.225 r90 bottom
R60 "10K" RESC1005X37N 24.003,40.36 r270 bottom
R61 "10K" RESC1005X37N 22.225,40.36 r90 bottom
R62 "10K" RESC1005X37N 25.146,51.841 r270 bottom
R63 "1K" RESC1005X37N 26.924,51.841 r90 bottom
R64 "1K" RESC1005X37N 32.639,49.225 r270 bottom
R65 "1K" RESC1005X37N 23.114,40.36 r270 bottom
R66 "22R" RESC1005X37N 7.95,54.559 r180 bottom
R67 "22R" RESC1005X37N 9.881,41.859 r0 bottom
R68 "22R" RESC1005X37N 8.001,35.001 r180 bottom
R69 "22R" RESC1005X37N 21.539,49.022 r0 bottom
R70 "22R" RESC1005X37N 21.539,46.558 r0 bottom
R71 "22R" RESC1005X37N 21.539,44.348 r0 bottom
R72 "1K" RESC1005X37N 30.099,40.564 r90 bottom
R73 "1K" RESC1005X37N 33.426,47.904 r90 top
U3 "INA169NA/3K" SOT95P280X145-5N 23.063,7.595 r0 bottom

## Footprints (in the part's own frame and the unit in brackets; to place one, negate y for a bottom-side part, rotate by r counter-clockwise, add the part's x,y. Pads: shape width x height; smd on the part's side, far side on the other; paste and mask are expansions set on the pad)
CAPC1005X55N [mm]
  rect 0.406x0.6 smd: 1(-0.432,0) 2(0.432,0)
  body extent -0.5,-0.27 0.5,0.28, height 0.5
CAPC1608X90N [mm]
  rect 0.508x0.93 smd: 1(-0.77,0) 2(0.77,0)
  body extent -0.8,-0.44 0.8,0.46, height 0.81
CAPC3216X190N [mm]
  rect 1.37x1.91 smd: 1(-1.421,0) 2(1.421,0)
  silkscreen extent -0.42,-0.95 0.42,0.95, body extent -1.6,-0.95 1.6,0.95, height 1.56
IND_BOURNS_SRN3015 [mil]
  rect 39x106 smd paste+0 mask+0: 1(-43,0) 2(43,0)
  silkscreen extent -22,-66 22,66, body extent -61,-61 61,61, height 59
JST_SM08B-SRSS-TB(LF)(SN) [mm]
  rect 0.6x1.55 smd: 1(-3.5,4.775) 2(-2.5,4.775) 3(-1.5,4.775) 4(-0.5,4.775) 5(0.5,4.775) 6(1.5,4.775) 7(2.5,4.775) 8(3.5,4.775)
  rect 1.2x1.8 smd: P1(-4.8,0.9) P2(4.8,0.9)
  silkscreen extent -4.58,0.2 3.9,5.38, body extent -5,0.13 5,5.08, height 2.97
QFN50P700X700X100-49N-D [mm]
  rect 0.85x0.3 smd: 1(-3.45,2.75) 2(-3.45,2.25) 3(-3.45,1.75) 4(-3.45,1.25) 5(-3.45,0.75) 6(-3.45,0.25) 7(-3.45,-0.25) 8(-3.45,-0.75) 9(-3.45,-1.25) 10(-3.45,-1.75) 11(-3.45,-2.25) 12(-3.45,-2.75) 25(3.45,-2.75) 26(3.45,-2.25) 27(3.45,-1.75) 28(3.45,-1.25) 29(3.45,-0.75) 30(3.45,-0.25) 31(3.45,0.25) 32(3.45,0.75) 33(3.45,1.25) 34(3.45,1.75) 35(3.45,2.25) 36(3.45,2.75)
  rect 0.3x0.85 smd: 13(-2.75,-3.45) 14(-2.25,-3.45) 15(-1.75,-3.45) 16(-1.25,-3.45) 17(-0.75,-3.45) 18(-0.25,-3.45) 19(0.25,-3.45) 20(0.75,-3.45) 21(1.25,-3.45) 22(1.75,-3.45) 23(2.25,-3.45) 24(2.75,-3.45) 37(2.75,3.45) 38(2.25,3.45) 39(1.75,3.45) 40(1.25,3.45) 41(0.75,3.45) 42(0.25,3.45) 43(-0.25,3.45) 44(-0.75,3.45) 45(-1.25,3.45) 46(-1.75,3.45) 47(-2.25,3.45) 48(-2.75,3.45)
  rect 2.7x2.7 smd: 49(0,0)
  silkscreen extent -4,3.38 -3.75,3.62, body extent -3.55,-3.55 3.55,3.55, height 1
RESC1005X37N [mm]
  rect 0.54x0.6 smd: 1(-0.432,0) 2(0.432,0)
  body extent -0.5,-0.25 0.5,0.25, height 0.37
RESC6232X104N [mm]
  rect 2.58x3.46 smd: 1(-2.316,0) 2(2.316,0)
  silkscreen extent -0.7,-1.73 0.7,1.73, body extent -3.13,-1.6 3.13,1.6, height 1.04
SOD2512X115N [mm]
  rect 1.05x0.5 smd: A(1.185,0) C(-1.185,0)
  silkscreen extent -2.4,-0.63 0.85,0.63
SOT95P280X145-5N [mm]
  rrect50% 1.21x0.59 smd: 1(-1.255,0.95) 2(-1.255,0) 3(-1.255,-0.95) 4(1.255,-0.95) 5(1.255,0.95)
  silkscreen extent -2.51,-1.45 0.8,1.45, body extent -1.4,-1.45 1.4,1.45, height 1.45
TRANS_TPHR8504PL,L1Q [mm]
  rect 1.45x0.85 smd: 1(-2.75,1.905) 2(-2.75,0.635) 3(-2.75,-0.635) 4(-2.75,-1.905)
  rect 1.05x0.85 smd: 5(2.95,-1.905) 6(2.95,-0.635) 7(2.95,0.635) 8(2.95,1.905)
  rect 3.75x4.7 smd paste-3: 9(0.55,0)
  silkscreen extent -4.1,-2.55 2.5,2.55, body extent -3,-2.65 3,2.65, height 1

## Part data
C1 C2 C4 C5 C6 C7 C9 C10 C12 C13 C15 C16 C17 C18 C19 C21 C22 C23 C24 C25 C27 C28 C29 C31 C32 C33 C34 C36 C37: library part GRM1555C1H222JA01D, Package=None, Availability=Unavailable, MP=GRM1555C1H222JA01D, Price=None
C3 C8 C11 C14 C20 C26 C30 C35: library part GRM188R71E224JA88D, "SMD Capacitor X7R(EIA) with Capacitance: 0.22uF Tol. 5%. Rated Voltage: 25Vdc", Package=None, Availability=Unavailable, MP=GRM188R71E224JA88D, Price=None
C38 C39 C40 C41 C42 C43 C44 C45 C46 C47 C48 C49 C50 C51 C52 C53 C54 C55 C56 C57: library part GRM31CC80G227ME11K, "Ceramic Capacitor", Package=None, Availability=Unavailable, MP=GRM31CC80G227ME11K, Price=None
D1 D2 D3 D4 R32 R33 U3: Package=None, Availability=Unavailable, Price=None
  D1 D2 D3 D4: MF="{'manufacturer': u'Micro Commercial Components'}", MP=B5819WS-TP
  R32 R33: MF="{'manufacturer': u'Stackpole Electronics Inc'}", MP=CSSH2512JTL500
  U3: MF="{'manufacturer': u'Texas Instruments'}", MP=INA169NA/3K
IC1 IC2 IC3 IC4: "Integrated Circuit", Manufacturer_Name=STMicroelectronics, Mouser Part Number=511-STSPIN32F0ATR, Arrow Part Number=STSPIN32F0ATR, Arrow Price/Stock=https://www.arrow.com/en/products/stspin32f0atr/stmicroelectronics, Datasheet Link=http://www.st.com/content/ccc/resource/technical/document/datasheet/group3/3d/88/0f/d1/3f/0c/49/80/DM00406030/files/DM00406030.pdf/jcr:content/translations/en.DM00406030.pdf, Height=1mm, Manufacturer_Part_Number=STSPIN32F0ATR, Mouser Price/Stock=https://www.mouser.co.uk/ProductDetail/STMicroelectronics/STSPIN32F0ATR?qs=1mbolxNpo8flc7yUpKWOVQ%3D%3D
J1: "SH Series 8 Position 1 mm Pitch Surface Mount Side Entry Shrouded Header", Package=None, Availability=Unavailable, MP=SM08B-SRSS-TB(LF)(SN), Price=None
L1 L2 L3 L4: library part SRN3015-220M, "No Description Available", MFR_NAME="Bourns Electronics", COPYRIGHT="Copyright (C) 2022 Ultra Librarian. All rights reserved.", DIGI-KEY_PART_NUMBER_1=SRN3015-220MCT-ND, DIGI-KEY_PART_NUMBER_2=SRN3015-220MDKR-ND, DIGI-KEY_PART_NUMBER_3=SRN3015-220MTR-ND, Manufacturer_Part_Number=SRN3015-220M, RefDes=RefDes, Type=DEV
Q1 Q2 Q3 Q4 Q5 Q6 Q7 Q8 Q9 Q10 Q11 Q12 Q13 Q14 Q15 Q16 Q17 Q18 Q19 Q20 Q21 Q22 Q23 Q24: "N-Channel 40V 150A (Tc) 1W (Ta), 170W (Tc) Surface Mount 8-SOP Advance (5x5)", Package="SOP-8 Toshiba", Availability=Unavailable, MF="Toshiba Semiconductor", MP=TPHR8504PL,L1Q, Price=None, SnapEDA_Link=https://www.snapeda.com/parts/TPHR8504PL,L1Q/Toshiba%20Semiconductor%20and%20Storage/view-part/604439/?ref=snap
R1 R2 R3 R4 R5 R6 R7 R8 R9 R10 R11 R12 R13 R14 R15 R16 R17 R18 R19 R20 R21 R22 R23 R24 R25 R26 R27 R28 R29 R30 R31 R34 R35 R36 R37 R38 R39 R40 R41 R42 R43 R44 R45 R46 R47 R48 R49 R50 R51 R52 R53 R54 R55 R56 R57 R58 R59 R60 R61 R62 R63 R64 R65 R66 R67 R68 R69 R70 R71 R72 R73: library part RE0402BRE07330KL, Package=None, Availability=Unavailable, MF="{'manufacturer': u'Yageo'}", MP=RE0402BRE07330KL, Price=None

## Free pads (board coordinates)
  rrect50% 2.5x4 smd mask-0.076: 0.8MM(8.255,8.611) 0.8MM(8.255,20.726) 0.8MM(8.255,26.34) 0.8MM(8.255,32.258) 0.8MM(8.255,38.913) 0.8MM(8.255,51.943) 0.8MM(51.105,8.611) 0.8MM(51.105,21.412) 0.8MM(51.105,27.254) 0.8MM(51.105,33.122) 0.8MM(51.105,38.913) 0.8MM(51.105,53.035)
  rrect50% 0.8x0.8 smd far side mask-0.076: 0.8MM(21.793,30.378) 0.8MM(21.869,31.648) 0.8MM(22.022,50.444) 0.8MM(22.073,51.74)
  rrect50% 5x2.5 smd far side mask-0.076: 0.8MM(23.266,11.354) 0.8MM(36.246,11.201)
  rrect50% 15x2.5 smd mask-0.076: 0.8MM(29.591,12.979)
  rrect50% 0.8x0.8 smd mask-0.076: 0.8MM(35.992,41.885) 0.8MM(36.551,26.416) 0.8MM(37.066,41.868) 0.8MM(37.567,26.416)
  rrect50% 2.5x46 smd mask-0.076: "BUS BAR"(19.304,30)
  rrect50% 2.5x46 smd far side mask-0.076: "BUS BAR"(19.304,30)
  rrect50% 2.5x47 smd far side mask-0.076: "BUS BAR"(40.132,30)
  rrect50% 2.5x47 smd mask-0.076: "BUS BAR"(40.132,31)
  rrect50% 7x5 smd mask-0.076: XT60(24.892,6.985) XT60(34.442,6.985)

## Via types
v1: diameter 0.6, hole 0.3, Top Layer to Bottom Layer, tented both sides, 480 vias
v2: diameter 0.559, hole 0.254, Top Layer to Bottom Layer, tented both sides, 127 vias
v3: diameter 1.8, hole 1.5, Top Layer to Bottom Layer, tented both sides, 12 vias
v4: diameter 0.6, hole 0.254, Top Layer to Bottom Layer, tented both sides, 10 vias

## Nets (pads, with @x,y where several pads share a name; then routed paths per layer and width w, separated by ;. In a path a pad name is that pad's centre, name@x,y a point inside that pad or via, vN(x,y) a via of type N, cw(c..) or ccw(c..) an arc to the next point about the centre after c; other vN are vias at no path point)
3V32: C16.2 C17.2 C20.2 C21.2 IC1.10 IC1.48 L2.2 U3.5 | length 44.2
  Top Layer w0.203: C16.2@28.804,25.578 29.284,25.578 29.457,25.405 IC1.48@29.457,24.278
  Top Layer w0.254: C21.2@27.534,18.415 27.534,18.923 27.689,19.078 IC1.10@28.757,19.078
  Top Layer w0.356: C20.2@24.875,15.545 26.459,15.545 26.667,15.753 26.667,16.619 v2(26.688,16.64) ; v2@26.688,16.695 26.688,18.181 26.897,18.39 27.508,18.39 C21.2@27.534,18.415 ; C16.2@28.792,25.589 C16.2@28.804,25.578 C16.2@28.811,25.571
  Top Layer w0.508: L2.2@24.511,17.374 24.633,17.374 24.875,17.132 C20.2@24.875,15.545
  Layer 1 w0.356: v2(26.688,16.64) 28.792,18.744 v2(28.792,25.582)
  Layer 2 w0.305: v2(20.549,4.674) 21.335,4.674 21.514,4.852 21.514,6.197 21.692,6.375 25.781,6.375 26.688,7.283 v2(26.688,16.64)
  Bottom Layer w0.203: v2(20.549,4.674) 20.625,4.597 20.65,4.597 20.701,4.547 24.392,4.547 24.511,4.666 C17.2@24.511,5.41 24.511,6.455 24.321,6.645 U3.5@24.318,6.645
3V33: C5.2 C8.2 C9.2 IC2.10 IC2.48 L1.2 | length 24.7
  Top Layer w0.254: 26.721,30.912 26.721,33.147 26.873,33.3 C9.2@27.483,33.3 27.483,33.911 27.682,34.11 IC2.10@28.757,34.11 ; v2(29.131,41.146) 29.12,41.135 29.12,40.55 C5.2@29.109,40.538 29.109,40.442 29.185,40.365 29.208,40.365 29.457,40.116 IC2.48@29.457,39.31
  Top Layer w0.508: L1.2@24.74,31.496 24.519,31.275 24.519,29.532 24.73,29.532 24.85,29.412 26.423,29.412 26.721,29.71 26.721,30.311 ; 26.721,30.912 26.721,30.311 ; v2(27.28,30.455) 27.136,30.311 26.721,30.311
  Layer 1 w0.508: v2(27.28,30.455) 27.28,30.468 27.578,30.767 27.578,32.723 29.131,34.275 v2(29.131,41.146)
3V34: C23.2 C26.2 C27.2 IC3.10 IC3.48 L3.2 | length 26.8
  Layer 1 w0.356: v2(31.938,30.749) 31.941,30.745 32.53,30.745 33.676,29.599 33.676,20.109 v2(32.563,18.995)
  Bottom Layer w0.254: IC3.48@29.598,29.18 29.596,29.182 29.596,30.815 C23.2@29.642,30.861 ; IC3.10@30.298,23.98 30.304,23.974 31.398,23.974 31.699,23.673 32.182,23.673 C27.2@32.258,23.597 32.327,23.528 32.723,23.528 32.888,23.363 32.888,21.904 32.614,21.629 32.614,21.166 32.614,21.023 C26.2@32.545,20.955
  Bottom Layer w0.406: C23.2@29.642,30.861 29.972,30.861 30.072,30.961 30.923,30.961 31.139,30.745 31.934,30.745 v2(31.938,30.749)
  Bottom Layer w0.508: C26.2@32.545,20.955 32.545,19.027 32.563,19.009 v2(32.563,18.995) ; C26.2@32.614,21.166 34.374,21.166 L3.2@34.595,21.387
3V35: C32.2 C35.2 C36.2 IC4.10 IC4.48 L4.2 | length 28.3
  Bottom Layer w0.254: C36.2@29.591,50.622 29.594,50.619 29.594,49.042 IC4.48@29.598,49.039 ; IC4.10@30.298,43.839 30.318,43.819 31.005,43.819 31.496,43.328 C32.2@31.496,43.231 31.496,41.682 31.725,41.453 32.537,41.453 32.842,41.148 32.842,40.894 33.045,40.691 C35.2@34.806,40.691
  Bottom Layer w0.356: C36.2@29.591,50.622 34.313,50.622 35.577,49.358 38.1,46.835 38.1,42.393 36.38,40.673 C35.2@34.823,40.673
  Bottom Layer w0.508: C35.2@34.806,40.691 34.806,41.715 L4.2@35.001,41.91
6S: "pad.BUS BAR"@19.304,30 "pad.BUS BAR"@40.132,30 C1.2 C2.2 C13.2 C29.2 C38.2 C39.2 C40.2 C41.2 C42.2 C43.2 C44.2 C45.2 C46.2 C47.2 C48.2 C49.2 C50.2 C51.2 C52.2 C53.2 C54.2 C55.2 C56.2 C57.2 IC1.8 IC2.8 IC3.8 IC4.8 J1.8 pad.0.8MM@23.266,11.354 pad.0.8MM@36.246,11.201 Q1.5 Q1.6 Q1.7 Q1.8 Q1.9 Q2.5 Q2.6 Q2.7 Q2.8 Q2.9 Q3.5 Q3.6 Q3.7 Q3.8 Q3.9 Q7.5 Q7.6 Q7.7 Q7.8 Q7.9 Q8.5 Q8.6 Q8.7 Q8.8 Q8.9 Q9.5 Q9.6 Q9.7 Q9.8 Q9.9 Q13.5 Q13.6 Q13.7 Q13.8 Q13.9 Q14.5 Q14.6 Q14.7 Q14.8 Q14.9 Q15.5 Q15.6 Q15.7 Q15.8 Q15.9 Q19.5 Q19.6 Q19.7 Q19.8 Q19.9 Q20.5 Q20.6 Q20.7 Q20.8 Q20.9 Q21.5 Q21.6 Q21.7 Q21.8 Q21.9 R32.2 R33.2 U3.4 | length 58.5
  Top Layer w0.203: C13.2@27.559,20.244 v1@27.559,20.709
  Top Layer w0.229: v2(25.121,35.763) 25.552,35.763 25.713,35.923 26.809,35.923 27.089,35.643 27.089,35.298 27.277,35.11 IC2.8@28.757,35.11
  Top Layer w0.254: C13.2@27.559,20.244 27.559,20.154 27.635,20.078 IC1.8@28.757,20.078
  Layer 1 w0.762: v1(33.147,45.491) 37.273,45.491 37.719,45.938 v1(37.719,49.022)
  Layer 2 w0.559: v2(21.037,20.174) 21.749,19.461 27.019,19.461 27.574,20.016 v1(27.574,20.681)
  Bottom Layer w0.203: C1.2@31.597,24.98 C1.2@31.699,25.082 ; C1.2@31.699,25.095 31.699,25.581 31.818,25.7 32.954,25.7 ; 39.023,26.086 40.132,27.194 40.132,30
  Bottom Layer w0.254: IC3.8@30.298,24.98 C1.2@31.597,24.98 ; IC4.8@30.298,44.839 31.42,44.839 31.496,44.915 C29.2@31.496,45.009 ; C29.2@31.496,44.933 31.572,45.009 31.572,45.444 31.721,45.593 32.825,45.593 32.861,45.558 33.081,45.558 v1(33.147,45.491) ; 32.954,25.7 33.826,26.572 34.938,26.572 34.968,26.602
  Bottom Layer w0.305: 34.968,26.602 36.39,26.602 36.906,26.086 39.023,26.086
  Bottom Layer w0.381: U3.4@24.318,8.545 24.318,10.805 24.77,11.257 R33.2@28.042,11.257 ; R32.2@31.852,11.257 32.487,10.621 35.886,10.621 36.353,10.154 pad.0.8MM@37.57,10.154
  Bottom Layer w0.559: 20.44,19.983 20.631,20.174 v2(21.037,20.174)
  Bottom Layer w0.762: v2(37.186,51.105) 37.719,50.571 v1(37.719,49.022)
  Bottom Layer w1.524: C48.2@37.87,31.775 39.644,31.775 40.132,31.287 40.132,30
  other v1: 8.306,12.903 8.941,12.903 9.55,12.903 8.28,13.589 8.992,13.589 9.576,13.589 8.255,43.79 8.915,43.79 9.55,43.79 8.255,44.526 8.915,44.526 9.55,44.526 22.809,53.848 23.444,53.848 22.149,54.508 22.809,54.508 23.47,54.508 22.123,55.194 22.809,55.194 23.47,55.194
  other v2: 49.835,12.852 50.495,12.852 51.105,12.852 49.835,13.589 50.521,13.589 51.105,13.589 21.615,35.89 22.25,35.89 22.809,35.89 21.615,36.627 22.25,36.627 22.809,36.627 49.86,43.79 50.47,43.79 51.079,43.79 49.835,44.501 50.444,44.501 51.079,44.501 36.536,51.09 37.821,51.105 36.551,51.816 37.186,51.816 37.821,51.816
BEMFA2: IC1.45 R21.1 R22.2 R28.1 | length 3.9
  Top Layer w0.254: IC1.45@30.957,24.278 30.957,26.136 31.11,26.289 R21.1@31.14,26.289 R28.1@32.029,26.289 R22.2@32.918,26.289
BEMFA3: IC2.45 R1.1 R2.2 R8.1 | length 4.2
  Top Layer w0.254: IC2.45@30.957,39.31 30.957,41.274 31.263,41.58 R1.1@31.293,41.58 R8.1@32.182,41.58 R2.2@33.071,41.579
BEMFA4: IC3.45 R18.1 R19.2 R46.1 | length 4.5
  Bottom Layer w0.254: R19.2@25.756,31.648 R46.1@26.645,31.648 R18.1@27.534,31.648 27.564,31.648 28.098,31.114 IC3.45@28.098,29.18
BEMFA5: IC4.45 R56.1 R57.2 R63.1 | length 4.3
  Bottom Layer w0.254: R56.1@27.813,51.409 27.843,51.409 28.098,51.155 IC4.45@28.098,49.039
  Bottom Layer w0.305: R57.2@26.035,51.409 R63.1@26.924,51.409 R56.1@27.813,51.409
BEMFB2: IC1.1 R23.1 R24.2 R29.1 | length 4.5
  Top Layer w0.203: R24.2@24.689,24.74 R29.1@25.578,24.74 R23.1@26.492,24.74 26.625,24.607 26.955,24.607 27.984,23.578 IC1.1@28.757,23.578
BEMFB3: IC2.1 R3.1 R4.2 R9.1 | length 4.7
  Top Layer w0.254: R4.2@25.044,40.005 R9.1@25.959,40.005 R3.1@26.873,40.005 27.484,40.005 27.676,39.814 27.676,39.149 28.192,38.633 28.734,38.633 IC2.1@28.757,38.61
BEMFB4: IC3.1 R20.1 R42.2 R47.1 | length 4.1
  Bottom Layer w0.254: IC3.1@30.298,28.48 30.573,28.48 30.596,28.503 30.596,28.747 31.466,29.617 R47.1@32.918,29.617 R42.2@33.807,29.617
BEMFB5: IC4.1 R58.1 R59.2 R64.1 | length 4.3
  Bottom Layer w0.254: IC4.1@30.298,48.339 30.573,48.339 30.596,48.362 30.596,49.214 31.039,49.657 R58.1@31.75,49.657 R64.1@32.639,49.657 R59.2@33.528,49.657
BEMFC2: IC1.23 R25.1 R26.2 R30.1 | length 3.2
  Top Layer w0.203: IC1.23@34.457,17.378 34.457,16.567 34.844,16.18 R25.1@34.874,16.18
  Top Layer w0.305: R25.1@34.874,16.18 R30.1@35.763,16.18 R26.2@36.652,16.18
BEMFC3: IC2.23 R5.1 R6.2 R10.1 | length 3.4
  Top Layer w0.254: IC2.23@34.457,32.41 34.457,31.274 34.793,30.938 R5.1@34.823,30.938 R10.1@35.712,30.937 R6.2@36.601,30.937
BEMFC4: IC3.23 R43.1 R44.2 R48.1 | length 3.5
  Bottom Layer w0.254: R44.2@22.352,20.777 R48.1@23.241,20.777 24.16,20.777 24.598,21.215 IC3.23@24.598,22.28
BEMFC5: IC4.23 R60.1 R61.2 R65.1 | length 3.4
  Bottom Layer w0.203: R61.2@22.225,40.792 R65.1@23.114,40.792 R60.1@24.003,40.792 24.033,40.792 24.598,41.357 IC4.23@24.598,42.139
BOOT02: IC1.42 R27.2 | length 3.2
  Top Layer w0.254: IC1.42@32.457,24.278 32.457,25.421 32.639,25.603 33.706,25.603 33.858,25.756 33.858,26.238 R27.2@33.807,26.289
BOOT03: IC2.42 R7.2 | length 3.1
  Top Layer w0.254: IC2.42@32.457,39.31 32.457,40.053 33.222,40.818 33.476,40.818 33.787,41.128 33.787,41.437 33.93,41.58 R7.2@33.96,41.58
BOOT04: IC3.42 R45.2 | length 3.8
  Bottom Layer w0.254: R45.2@24.867,31.648 24.867,31.109 25.015,30.96 26.021,30.96 26.598,30.383 IC3.42@26.598,29.18
BOOT05: IC4.42 R62.2 | length 3.6
  Bottom Layer w0.203: R62.2@25.146,51.409 25.146,50.902 25.298,50.749 26.289,50.749 26.598,50.44 IC4.42@26.598,49.039
CLK2: IC1.38 pad.0.8MM@36.551,26.416 | length 3.7
  Top Layer w0.203: IC1.38@34.457,24.278 34.457,24.983 34.798,25.324 35.941,25.324 36.17,25.552 36.17,26.035 pad.0.8MM@36.551,26.416
CLK3: IC2.38 pad.0.8MM@35.992,41.885 | length 3.2
  Top Layer w0.203: IC2.38@34.457,39.31 34.457,40.123 35.754,41.42 35.754,41.647 pad.0.8MM@35.992,41.885
CLK4: IC3.38 pad.0.8MM@21.869,31.648 | length 4.4
  Bottom Layer w0.203: pad.0.8MM@21.869,31.648 23.302,31.648 24.598,30.353 IC3.38@24.598,29.18
CLK5: IC4.38 pad.0.8MM@22.073,51.74 | length 4.5
  Bottom Layer w0.203: pad.0.8MM@22.073,51.74 23.292,51.74 24.598,50.434 IC4.38@24.598,49.039
CUR: J1.6 R31.2 R34.1 | length 70.8
  Top Layer w0.305: v2(27.94,53.416) 28.385,52.971 J1.6@28.385,50.8
  Layer 1 w0.305: v1(20.574,5.486) 20.599,5.461 21.514,5.461 28.283,12.23 33.028,12.23 36.322,15.524 36.322,27.715 36.144,27.893 36.144,29.522 31.673,33.993 31.673,39.295 31.286,39.682 31.286,45.933 33.122,47.769 33.122,53.975 32.766,54.331 28.854,54.331 v2(27.94,53.416)
  Bottom Layer w0.203: R31.2@20.574,5.334 R34.1@21.615,5.334
ESC2: J1.5 R35.1 | length 48.8
  Top Layer w0.305: v2(28.245,15.316) R35.1@28.245,16.154 ; v2(29.312,53.34) 29.312,53.271 29.385,53.198 J1.5@29.385,50.8
  Layer 1 w0.305: v2(28.245,15.316) 25.476,15.316 24.536,16.256 24.536,18.034 24.13,18.44 24.13,21.133 23.571,21.692 23.571,24.257 24.13,24.816 25.176,24.816 25.653,25.293 25.653,27.507 26.508,28.362 26.508,43.825 25.527,44.806 25.527,46.685 27.026,48.184 27.026,51.13 29.235,53.34 v2(29.312,53.34)
ESC3: J1.4 R17.1 | length 27.6
  Top Layer w0.305: R17.1@29.058,29.997 30.256,29.997 v2(30.414,30.155) ; v2(30.378,53.34) 30.382,53.337 30.382,50.803 J1.4@30.385,50.8
  Layer 1 w0.305: v2(30.378,53.34) 29.817,52.779 29.817,30.752 v2(30.414,30.155)
ESC4: J1.3 R55.1 | length 41.1
  Top Layer w0.305: v2(31.293,52.527) 31.385,52.435 J1.3@31.385,50.8
  Layer 1 w0.305: v2(29.972,18.618) 31.098,18.618 32.969,20.489 32.969,29.232 32.092,30.109 31.441,30.109 30.468,31.083 30.468,48.731 31.369,49.632 31.369,51.007 31.293,51.083 v2(31.293,52.527)
  Bottom Layer w0.254: R55.1@29.489,20.117 29.489,19.355 29.82,19.025 29.82,18.767 29.968,18.618 v2(29.972,18.618)
ESC5: J1.2 R72.1 | length 22.9
  Top Layer w0.305: J1.2@32.385,50.8 v2(32.385,52.527)
  Layer 2 w0.305: v2(32.014,40.609) 32.014,40.657 31.414,41.256 31.414,43.675 31.862,44.122 35.283,44.122 36.627,45.466 36.627,49.905 34.005,52.527 v2(32.385,52.527)
  Bottom Layer w0.305: R72.1@30.099,40.132 31.293,40.132 31.769,40.609 v2(32.014,40.609)
GHA2: IC1.33 R36.2 | length 19.2
  Top Layer w0.203: v1(34.433,22.451) 34.433,22.385 34.743,22.075 35.655,22.075 IC1.33@35.657,22.078
  Layer 2 w0.305: v1(34.433,22.451) 37.754,22.451 37.991,22.687 44.506,22.687 45.971,24.152 v1(51.003,24.152)
  Bottom Layer w0.305: v1(51.003,24.152) 51.003,24.515 50.992,24.525 R36.2@51.054,24.587
GHA3: IC2.33 R11.2 | length 23.1
  Top Layer w0.254: v2(34.646,37.109) IC2.33@35.657,37.11
  Layer 2 w0.305: v2(34.646,37.109) 35.966,37.109 36.5,37.643 39.548,37.643 41.275,39.37 41.275,45.618 44.907,49.251 v2(48.006,49.251)
  Bottom Layer w0.305: R11.2@47.993,49.251 v2(48.006,49.251)
GHA4: IC3.33 R49.2 | length 20.9
  Layer 2 w0.305: v1(7.544,28.854) 7.594,28.905 14.711,28.905 16.429,30.623 21.925,30.623 v2(24.728,27.821)
  Bottom Layer w0.254: IC3.33@23.398,26.98 24.152,26.98 24.728,27.556 v2(24.728,27.821)
GHA5: IC4.33 R66.2 | length 24.4
  Layer 1 w0.305: v1(7.518,54.559) 7.544,54.585 18.059,54.585 18.999,53.645 18.999,48.412 20.015,47.396 23.876,47.396 v2(24.435,46.838)
  Layer 2 w0.305: v1(7.518,54.559) v1@7.518,54.686
  Bottom Layer w0.254: IC4.33@23.398,46.839 24.383,46.839 24.384,46.838 v2(24.435,46.838)
GHB2: IC1.29 R37.2 | length 17.3
  Top Layer w0.203: v1(34.544,20.066) 34.556,20.078 IC1.29@35.657,20.078
  Layer 2 w0.305: v1(34.544,20.066) 36.413,20.066 36.714,20.368 39.589,20.368 40.389,19.568 40.389,18.239 41.534,17.094 43.129,17.094 43.84,17.805 v1(47.269,17.805)
  Bottom Layer w0.305: v1(47.269,17.805) 47.282,17.818 48.196,17.818 R37.2@48.209,17.831
GHB3: IC2.29 R12.2 | length 20.7
  Top Layer w0.254: v2(34.62,35.128) 34.636,35.112 35.655,35.112 IC2.29@35.657,35.11
  Layer 2 w0.305: v2(34.62,35.128) 37.262,35.128 37.465,35.331 40.107,35.331 41.275,34.163 44.247,34.163 46.406,36.322 51.816,36.322 51.841,36.297 v2(51.892,36.297)
  Bottom Layer w0.305: R12.2@51.003,36.271 51.016,36.284 51.88,36.284 v2(51.892,36.297)
GHB4: IC3.29 R50.2 | length 20.4
  Layer 1 w0.305: v1(7.544,23.292) 7.569,23.317 15.596,23.317 17.078,24.8 19.491,24.8 19.969,25.278 22.687,25.278 23.464,26.054 v2(24.765,26.054)
  Bottom Layer w0.254: IC3.29@23.398,24.98 24.152,24.98 24.767,25.595 24.767,26.053 v2(24.765,26.054)
GHB5: IC4.29 R67.2 | length 20
  Layer 2 w0.305: v1(11.201,41.808) 11.744,42.351 15.451,42.351 17.145,44.045 17.145,45.582 18.908,47.346 22.098,47.346 22.555,46.888 22.555,45.949 23.673,44.831 v2(24.46,44.831)
  Bottom Layer w0.254: IC4.29@23.398,44.839 24.351,44.839 24.359,44.831 v2(24.46,44.831)
  Bottom Layer w0.305: R67.2@10.313,41.859 10.338,41.834 11.176,41.834 v1(11.201,41.808)
GHC2: IC1.25 R38.2 | length 24
  Top Layer w0.203: IC1.25@35.657,18.078 36.303,18.078 36.728,17.653 37.033,17.653 37.16,17.526 v1(37.16,17.501)
  Layer 2 w0.305: v1(37.16,17.501) 38.227,17.501 38.684,17.043 38.684,16.256 39.903,15.037 39.903,5.256 40.547,4.612 45.887,4.612 46.08,4.805 46.128,4.805 46.275,4.953 v1(46.355,4.953)
  Bottom Layer w0.305: v1(46.355,4.953) 46.38,4.978 47.65,4.978 R38.2@47.676,5.004
GHC3: IC2.25 R13.2 | length 20.7
  Top Layer w0.254: IC2.25@35.657,33.11 35.68,33.087 36.224,33.087 36.373,32.939 36.373,32.616 36.432,32.557 v2(36.432,32.475)
  Layer 2 w0.305: v2(36.432,32.475) 36.447,32.46 39.6,32.46 40.488,31.572 40.488,29.591 40.996,29.083 43.307,29.083 44.602,30.378 v2(51.867,30.378)
  Bottom Layer w0.305: R13.2@51.003,30.378 v2(51.867,30.378)
GHC4: IC3.25 R51.2 | length 23.3
  Layer 1 w0.305: v1(11.151,11.608) 11.151,11.557 12.04,10.668 18.44,10.668 20.549,12.776 20.549,17.805 22.352,19.609 v2(22.352,22.149)
  Bottom Layer w0.254: v2(22.352,22.149) 22.809,22.149 23.1,22.439 23.1,22.957 23.123,22.98 IC3.25@23.398,22.98
  Bottom Layer w0.305: R51.2@10.313,11.608 v1(11.151,11.608)
GHC5: IC4.25 R68.2 | length 19.2
  Layer 1 w0.305: v1(7.569,35.001) 15.113,35.001 v2(22.25,42.139)
  Bottom Layer w0.203: v2(22.25,42.139) 22.657,42.139 22.784,42.266 22.784,42.5 23.123,42.839 IC4.25@23.398,42.839
GLA2: IC1.36 R39.2 | length 2
  Top Layer w0.203: IC1.36@35.657,23.578 36.273,23.578 36.882,24.187 37.293,24.187 R39.2@37.338,24.232
GLA3: IC2.36 R14.2 | length 2
  Top Layer w0.203: IC2.36@35.657,38.61 36.299,38.61 36.449,38.76 36.449,39.014 36.678,39.243 R14.2@37.287,39.243
GLA4: IC3.36 R52.2 | length 1.6
  Bottom Layer w0.203: R52.2@22.022,29.007 22.022,28.977 22.19,28.808 22.423,28.808 22.752,28.48 IC3.36@23.398,28.48
GLA5: IC4.36 R69.2 | length 1.7
  Bottom Layer w0.203: R69.2@21.971,49.022 21.971,48.992 22.14,48.824 22.3,48.824 22.785,48.339 IC4.36@23.398,48.339
GLB2: IC1.32 R40.2 | length 1.8
  Top Layer w0.203: IC1.32@35.657,21.578 36.378,21.578 36.771,21.971 R40.2@37.338,21.971
GLB3: IC2.32 R15.2 | length 1.8
  Top Layer w0.203: IC2.32@35.657,36.61 36.356,36.61 36.678,36.932 R15.2@37.287,36.932
GLB4: IC3.32 R53.2 | length 1.5
  Bottom Layer w0.203: R53.2@22.022,26.822 22.022,26.792 22.19,26.624 22.22,26.624 22.251,26.594 22.657,26.594 22.77,26.48 IC3.32@23.398,26.48
GLB5: IC4.32 R70.2 | length 1.5
  Bottom Layer w0.203: R70.2@21.971,46.558 22.454,46.558 22.673,46.339 IC4.32@23.398,46.339
GLC2: IC1.28 R41.2 | length 1.7
  Top Layer w0.203: IC1.28@35.657,19.578 36.545,19.578 36.652,19.685 R41.2@37.338,19.685
GLC3: IC2.28 R16.2 | length 1.7
  Top Layer w0.203: IC2.28@35.657,34.61 35.667,34.62 37.287,34.62 R16.2@37.312,34.646
GLC4: IC3.28 R54.2 | length 1.4
  Bottom Layer w0.203: R54.2@22.022,24.638 22.178,24.482 23.396,24.482 IC3.28@23.398,24.48
GLC5: IC4.28 R71.2 | length 1.4
  Bottom Layer w0.203: R71.2@21.971,44.348 21.976,44.344 23.393,44.344 IC4.28@23.398,44.339
GND: "pad.BUS BAR"@19.304,30 "pad.BUS BAR"@40.132,31 C1.1 C2.1 C3.1 C4.1 C5.1 C8.1 C9.1 C11.1 C12.1 C13.1 C14.1 C15.1 C16.1 C17.1 C20.1 C21.1 C23.1 C26.1 C27.1 C29.1 C30.1 C31.1 C32.1 C35.1 C36.1 C38.1 C39.1 C40.1 C41.1 C42.1 C43.1 C44.1 C45.1 C46.1 C47.1 C48.1 C49.1 C50.1 C51.1 C52.1 C53.1 C54.1 C55.1 C56.1 C57.1 D1.A D2.A D3.A D4.A IC1.44 IC1.49 IC2.44 IC2.49 IC3.44 IC3.49 IC4.44 IC4.49 J1.7 J1.P1 J1.P2 pad.0.8MM@29.591,12.979 pad.XT60@24.892,6.985 Q4.1 Q4.2 Q4.3 Q5.1 Q5.2 Q5.3 Q6.1 Q6.2 Q6.3 Q10.1 Q10.2 Q10.3 Q11.1 Q11.2 Q11.3 Q12.1 Q12.2 Q12.3 Q16.1 Q16.2 Q16.3 Q17.1 Q17.2 Q17.3 Q18.1 Q18.2 Q18.3 Q22.1 Q22.2 Q22.3 Q23.1 Q23.2 Q23.3 Q24.1 Q24.2 Q24.3 R7.1 R8.2 R9.2 R10.2 R27.1 R28.2 R29.2 R30.2 R34.2 R45.1 R46.2 R47.2 R48.2 R62.1 R63.2 R64.2 R65.2 U3.2 | length 91.9
  Top Layer w0.279: IC1.44@31.457,24.278 31.464,24.271 31.464,23.603 31.674,23.393 32.004,23.393 32.197,23.201 32.197,22.794 v1(32.258,22.733) 32.258,20.879 IC1.49@32.207,20.828
  Top Layer w0.305: 27.254,14.249 27.407,14.402 27.407,15.57 27.534,15.697 C21.1@27.534,17.551 ; R27.1@33.807,27.153 33.895,27.24 34.454,27.24 v2(34.646,27.432) ; R30.2@35.763,15.316 35.763,14.351 35.789,14.326
  Top Layer w0.508: 20.272,16.824 19.304,17.791 19.304,31.75 19.887,31.167 D1.A@21.574,31.167 21.578,31.163 21.578,30.212 22.047,29.743 C8.1@22.979,29.743 ; C20.1@23.335,15.545 23.335,14.283 23.343,14.275 ; 33.934,44.374 33.96,44.348 R7.1@33.96,42.444 ; v2(36.017,39.751) 36.031,39.751 36.31,40.03 36.982,40.03 37.915,40.963 39.164,40.963 40.132,39.995 40.132,31
  Top Layer w0.559: v2(37.821,25.248) 38.374,25.248 v2(38.399,25.222) 39.188,25.222 40.132,26.166 40.132,31
  Top Layer w0.762: 20.272,16.824 D2.A@21.514,16.824
  Top Layer w1.524: 19.304,31.75 19.304,38.601 19.792,39.089 C38.1@22.276,39.089
  Bottom Layer w0.305: IC3.49@26.848,25.73 IC3.49@27.598,26.48
  Bottom Layer w0.381: v1(22.479,5.334) 23.634,5.334 23.647,5.347 C17.1@23.647,5.41 ; C1.1@32.563,25.095 33.274,25.095 33.685,25.506 33.685,25.635 34.045,25.996 35.48,25.996
  Bottom Layer w0.457: C14.1@33.257,27.28 C14.1@33.282,27.305 ; 35.48,25.996 35.925,25.996 36.699,25.222 D3.A@36.974,25.222
  Bottom Layer w0.508: C56.1@24.765,34.037 24.867,33.936 R45.1@24.867,32.512 ; R46.2@26.645,32.512 26.645,33.606 27.076,34.037 C54.1@27.203,34.037 ; 26.67,17.678 26.695,17.704 v1(26.695,20.244) ; C36.1@29.591,51.486 33.427,51.486 34.163,52.222 34.163,53.569 v2(34.214,53.619) ; 30.963,17.628 31.005,17.67 C26.1@31.005,20.955 ; C35.1@34.823,39.133 35.603,39.133 35.916,39.446 35.916,39.649 v2(36.017,39.751)
  Bottom Layer w0.559: D3.A@36.974,25.222 v2(38.399,25.222)
  other v1: 9.5,15.723 8.89,15.748 8.28,15.773 29.958,15.826 31.308,15.818 32.012,15.826 32.696,15.819 33.36,15.823 30.631,15.838 8.28,16.459 8.89,16.459 9.5,16.459 25.578,23.241 25.578,23.876 23.114,39.928 8.28,46.634 8.915,46.634 9.525,46.634 8.28,47.371 8.915,47.371 9.525,47.371
  other v2: 21.808,7.595 49.835,15.723 50.444,15.723 51.079,15.723 49.809,16.459 50.439,16.458 51.079,16.459 31.197,20.202 31.795,20.222 31.191,20.879 31.787,20.868 27.864,24.74 27.915,25.603 27.33,25.629 27.887,26.251 36.982,28.651 37.617,28.651 38.278,28.651 36.975,29.28 37.604,29.288 38.273,29.296 32.487,34.798 33.172,34.798 32.487,35.408 33.172,35.408 32.36,43.231 32.36,44.983 26.647,45.741 27.28,45.745 26.645,46.38 27.28,46.38 49.835,46.685 50.444,46.685 51.054,46.685 49.809,47.371 50.444,47.371 51.029,47.371 34.569,47.422 34.9,47.904 34.302,47.948 25.146,52.273 26.924,52.273
IO2: IC1.37 pad.0.8MM@37.567,26.416 | length 4
  Top Layer w0.203: IC1.37@34.957,24.278 34.957,24.553 35.195,24.79 36.525,24.79 37.567,25.832 pad.0.8MM@37.567,26.416
IO3: IC2.37 pad.0.8MM@37.066,41.868 | length 3.8
  Top Layer w0.203: IC2.37@34.957,39.31 34.957,39.999 35.076,40.118 35.652,40.694 36.298,40.694 36.915,41.311 36.915,41.717 pad.0.8MM@37.066,41.868
IO4: IC3.37 pad.0.8MM@21.793,30.378 | length 3.2
  Bottom Layer w0.203: pad.0.8MM@21.793,30.378 23.661,30.378 24.098,29.941 IC3.37@24.098,29.18
IO5: IC4.37 pad.0.8MM@22.022,50.444 | length 3.1
  Bottom Layer w0.203: pad.0.8MM@22.022,50.444 23.52,50.444 24.098,49.867 IC4.37@24.098,49.039
MOTOR2A: C18.1 IC1.34 pad.0.8MM@51.105,27.254 Q7.1 Q7.2 Q7.3 Q10.5 Q10.6 Q10.7 Q10.8 Q10.9 R22.1 | length 27
  Top Layer w0.203: IC1.34@35.657,22.578 37.945,22.578 38.151,22.784 38.151,23.292 v1(38.202,23.343)
  Top Layer w0.254: R22.1@32.918,27.153 32.977,27.212 32.977,27.655 33.364,28.042 36.805,28.042 v2(37.363,27.483)
  Layer 2 w0.305: v2(37.363,27.483) 36.786,26.906 36.786,24.72 38.164,23.343 v1(38.202,23.343) 43.739,23.343 44.044,23.647 44.044,26.035 45.364,27.356 48.597,27.356 v1@48.648,27.407
  other v1: 50.75,25.537 51.389,25.533 51.997,25.611 50.151,25.715 50.602,26.132 51.623,26.131 48.648,26.314 49.276,26.314 49.936,26.314 48.641,26.949 49.276,26.949 49.911,26.949 49.276,27.559 49.911,27.559 48.648,27.584 48.641,28.219 49.276,28.219 49.911,28.219 51.816,28.245 48.648,28.854 49.276,28.854 49.911,28.854 50.546,28.854 51.181,28.854 51.816,28.854
  other v3: 51.105,27.254
MOTOR2B: C19.1 IC1.30 pad.0.8MM@51.105,21.412 Q8.1 Q8.2 Q8.3 Q11.5 Q11.6 Q11.7 Q11.8 Q11.9 R24.1 | length 28.9
  Top Layer w0.203: IC1.30@35.657,20.578 36.699,20.578 36.805,20.472 38.083,20.472 38.202,20.591 v1(38.202,21.082)
  Layer 1 w0.305: v1(38.202,21.082) 47.803,21.082 48.489,21.768 v1(48.622,21.768)
  Layer 2 w0.305: v1(24.689,23.876) 24.689,23.118 25.26,22.548 29.421,22.548 30.432,21.536 36.528,21.536 36.982,21.082 v1(38.202,21.082)
  other v1: 50.19,19.761 50.8,19.761 51.41,19.761 52.045,19.761 50.495,20.32 51.765,20.345 48.622,20.498 49.251,20.498 49.886,20.498 48.616,21.133 49.251,21.133 49.886,21.133 49.251,21.768 49.886,21.768 48.616,22.403 49.251,22.403 49.886,22.403 48.622,23.038 49.251,23.038 49.886,23.038 50.495,23.038 51.105,23.038 51.714,23.038
  other v3: 51.105,21.412
MOTOR2C: C22.1 IC1.26 pad.0.8MM@51.105,8.611 Q9.1 Q9.2 Q9.3 Q12.5 Q12.6 Q12.7 Q12.8 Q12.9 R26.1 | length 24.2
  Top Layer w0.203: IC1.26@35.657,18.578 36.413,18.578 36.8,18.191 38.105,18.191 38.202,18.288 ; R26.1@36.652,15.316 36.764,15.428 37.135,15.428 37.433,15.726 37.433,16.634 38.202,17.403 38.202,18.191 38.202,18.288 ; v1(38.202,18.796) 38.202,18.288
  Layer 1 w0.305: v1(38.202,18.796) 39.878,18.796 41.3,17.374 41.3,12.573 42.266,11.608 46.203,11.608 46.228,11.633 47.752,11.633 48.311,11.074 48.311,10.522 v1(48.622,10.211)
  other v1: 50.089,6.96 50.698,6.96 51.308,6.96 51.943,6.96 50.47,7.544 51.943,7.595 48.622,7.671 49.251,7.671 49.86,7.671 48.616,8.306 49.251,8.306 49.86,8.306 48.622,8.941 49.251,8.941 49.86,8.941 48.616,9.576 49.251,9.576 49.86,9.576 50.47,9.576 49.251,10.211 49.86,10.211 50.47,10.211 51.079,10.211 51.689,10.211
  other v3: 51.105,8.611
MOTOR3A: C6.1 IC2.34 pad.0.8MM@51.105,53.035 Q1.1 Q1.2 Q1.3 Q4.5 Q4.6 Q4.7 Q4.8 Q4.9 R2.1 | length 33
  Top Layer w0.203: IC2.34@35.657,37.61 37.941,37.61 38.075,37.744 38.075,38.278 v1(38.151,38.354)
  Top Layer w0.305: R2.1@33.071,42.443 33.183,42.555 v2(33.183,43.251)
  Layer 2 w0.305: v2(33.183,43.251) 33.183,39.258 34.087,38.354 v1(38.151,38.354) 38.172,38.375 38.654,38.375 39.903,39.624 39.903,45.72 46.228,52.045 v2@48.648,52.045
  other v1: 50.114,51.384 50.775,51.384 51.41,51.384 52.045,51.384 50.546,51.968 49.327,52.019 49.962,52.019 52.045,52.019 48.641,52.654 49.301,52.654 49.936,52.654 48.648,53.315 49.301,53.315 49.911,53.315 51.968,53.924 48.666,53.95 49.301,53.95 49.987,53.95 51.943,54.559 48.648,54.585 49.301,54.585 49.962,54.585 50.622,54.585 51.283,54.585
  other v2: 48.655,52.019
  other v3: 51.105,53.035